# EAGLE board 13514_TeensyView-panel.v10 (EAGLE 7.5.0), part 1 of 3
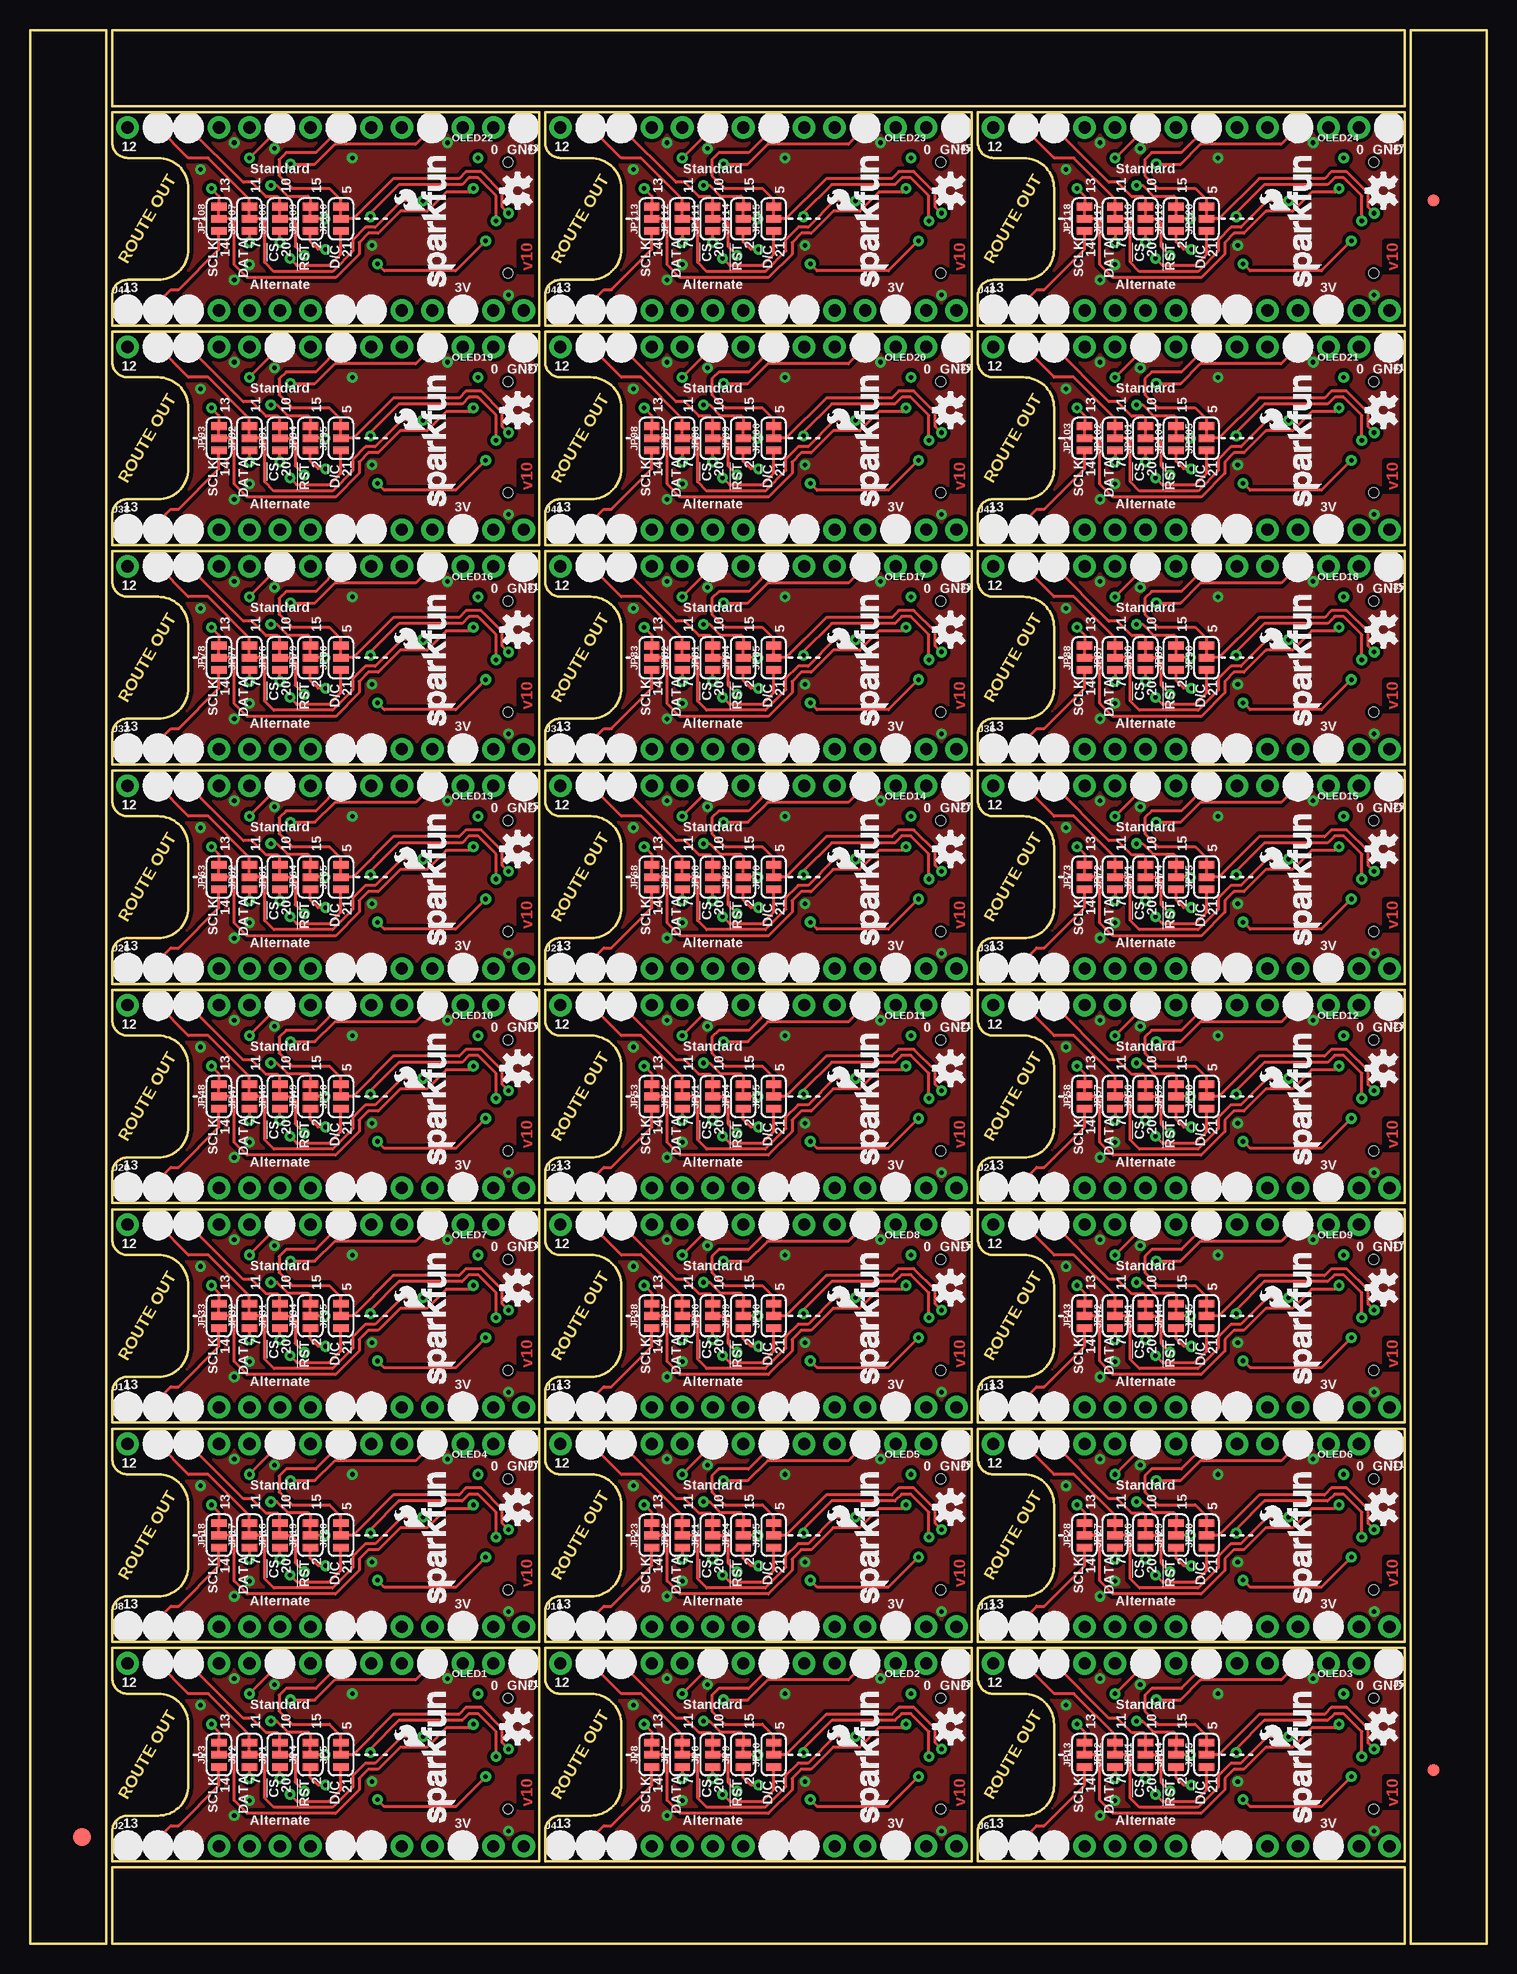
[diagram p0: board, top side]
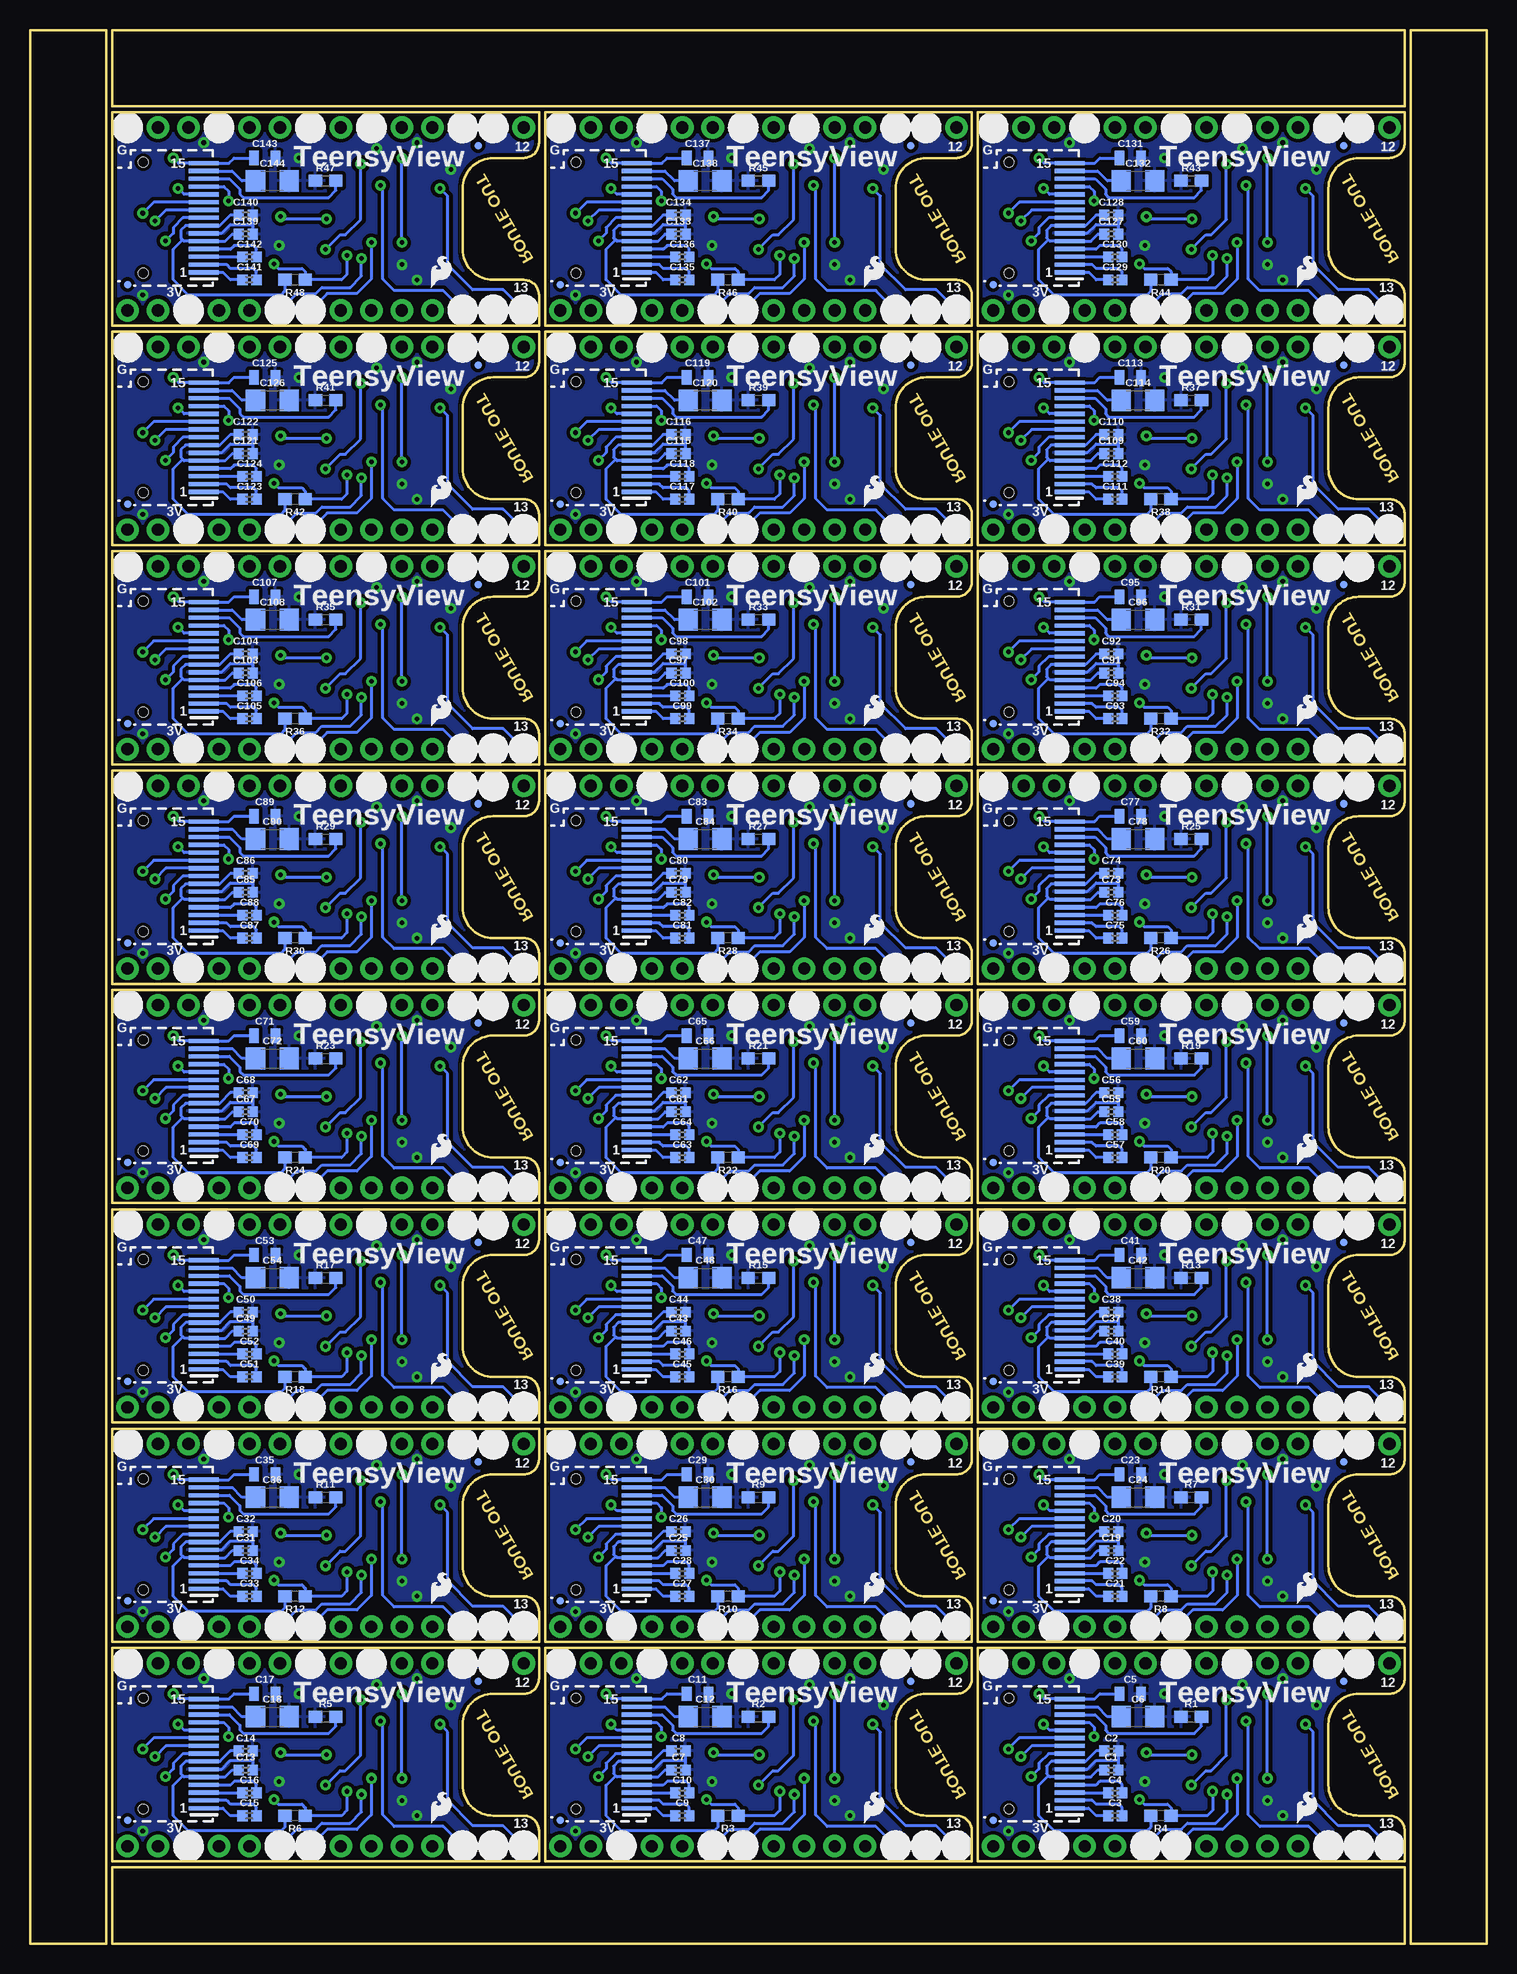
[diagram p1: board, bottom side, seen from below]

Size 121.41 x 159.51 mm. Coordinates in mm from the lower left corner, seen from the top.
Outline: 312 segments
Copper layers (1*16): Top 0.035mm / dielectric 1.5mm / Bottom 0.035mm
Design rules "SparkFun-2-layer-STANDARD": minimum track width 10mil, minimum drill 20mil, track to track 10mil, track to pad 8mil, pad to pad 8mil, via to via 10mil, smd to smd 8mil, copper to edge 8mil, drill to drill 8mil, minimum pad ring 10mil, minimum via ring 10mil, stop-mask expansion 4mil, vias tented up to drill 25mil, thermal gap 10mil

## Footprints (pad centres in the part's own frame; a part is rotated, then mirrored left to right if it is on the bottom)
0402 = smd 0.85 x 0.9: 1 -0.58,0; 2 0.58,0
0805 = smd 0.8 x 1.2: 1 -0.9,0; 2 0.9,0
1206 = smd 1.6 x 1.8: 1 -1.4,0; 2 1.4,0
FIDUCIAL-1.5X3 = smd 1.5 x 1.5: 1 0,0
FIDUCIAL-1X2 = smd 1 x 1: 1 0,0
FIDUCIAL-MICRO = smd 0.635 x 0.635: 1 0,0
1X14_NO_SILK = drill 1.016 pad 1.88: 1 0,0; 2 2.54,0; 3 5.08,0; 4 7.62,0; 5 10.16,0; 6 12.7,0; 7 15.24,0; 8 17.78,0; 9 20.32,0; 10 22.86,0; 11 25.4,0; 12 27.94,0; 13 30.48,0; 14 33.02,0
SMT-JUMPER_3_1-NC_TRACE_SILK = smd 0.635 x 1.27: 1 -1.016,0; 2 0,0; 3 1.016,0
OLED-UG-2832TSWGG01-REAR = smd 2.5 x 0.35 bottom: 1 0.75,-10.175; 2 0.75,-9.525; 3 0.75,-8.875; 4 0.75,-8.225; 5 0.75,-7.575; 6 0.75,-6.925; 7 0.75,-6.275; 8 0.75,-5.625; 9 0.75,-4.975; 10 0.75,-4.325; 11 0.75,-3.675; 12 0.75,-3.025; 13 0.75,-2.375; 14 0.75,-1.725; 15 0.75,-1.075 | hole 0.8: 5.8,-1; 5.8,-10.25
0603 = smd 1.1 x 1: 1 -0.85,0; 2 0.85,0
TP_15TH = drill 0.381 pad 0.61: P$1 0,0

## Placement (x,y rotation side)
C1  1.0uF  [0402]  31.31,14.48 0 bottom
C2  1.0uF  [0402]  31.31,16.07 0 bottom
C3  1.0uF  [0402]  30.99,10.67 0 bottom
C4  1.0uF  [0402]  30.99,12.57 0 bottom
C5  2.2uF  [0805]  29.72,20.83 0 bottom
C6  4.7uF  [1206]  29.08,18.92 0 bottom
C7  1.0uF  [0402]  67.37,14.48 0 bottom
C8  1.0uF  [0402]  67.37,16.07 0 bottom
C9  1.0uF  [0402]  67.06,10.67 0 bottom
C10  1.0uF  [0402]  67.06,12.57 0 bottom
C11  2.2uF  [0805]  65.79,20.83 0 bottom
C12  4.7uF  [1206]  65.15,18.92 0 bottom
C13  1.0uF  [0402]  103.44,14.48 0 bottom
C14  1.0uF  [0402]  103.44,16.07 0 bottom
C15  1.0uF  [0402]  103.12,10.67 0 bottom
C16  1.0uF  [0402]  103.12,12.57 0 bottom
C17  2.2uF  [0805]  101.85,20.83 0 bottom
C18  4.7uF  [1206]  101.22,18.92 0 bottom
C19  1.0uF  [0402]  31.31,32.77 0 bottom
C20  1.0uF  [0402]  31.31,34.35 0 bottom
C21  1.0uF  [0402]  30.99,28.96 0 bottom
C22  1.0uF  [0402]  30.99,30.86 0 bottom
C23  2.2uF  [0805]  29.72,39.12 0 bottom
C24  4.7uF  [1206]  29.08,37.21 0 bottom
C25  1.0uF  [0402]  67.37,32.77 0 bottom
C26  1.0uF  [0402]  67.37,34.35 0 bottom
C27  1.0uF  [0402]  67.06,28.96 0 bottom
C28  1.0uF  [0402]  67.06,30.86 0 bottom
C29  2.2uF  [0805]  65.79,39.12 0 bottom
C30  4.7uF  [1206]  65.15,37.21 0 bottom
C31  1.0uF  [0402]  103.44,32.77 0 bottom
C32  1.0uF  [0402]  103.44,34.35 0 bottom
C33  1.0uF  [0402]  103.12,28.96 0 bottom
C34  1.0uF  [0402]  103.12,30.86 0 bottom
C35  2.2uF  [0805]  101.85,39.12 0 bottom
C36  4.7uF  [1206]  101.22,37.21 0 bottom
C37  1.0uF  [0402]  31.31,51.05 0 bottom
C38  1.0uF  [0402]  31.31,52.64 0 bottom
C39  1.0uF  [0402]  30.99,47.24 0 bottom
C40  1.0uF  [0402]  30.99,49.15 0 bottom
C41  2.2uF  [0805]  29.72,57.4 0 bottom
C42  4.7uF  [1206]  29.08,55.5 0 bottom
C43  1.0uF  [0402]  67.37,51.05 0 bottom
C44  1.0uF  [0402]  67.37,52.64 0 bottom
C45  1.0uF  [0402]  67.06,47.24 0 bottom
C46  1.0uF  [0402]  67.06,49.15 0 bottom
C47  2.2uF  [0805]  65.79,57.4 0 bottom
C48  4.7uF  [1206]  65.15,55.5 0 bottom
C49  1.0uF  [0402]  103.44,51.05 0 bottom
C50  1.0uF  [0402]  103.44,52.64 0 bottom
C51  1.0uF  [0402]  103.12,47.24 0 bottom
C52  1.0uF  [0402]  103.12,49.15 0 bottom
C53  2.2uF  [0805]  101.85,57.4 0 bottom
C54  4.7uF  [1206]  101.22,55.5 0 bottom
C55  1.0uF  [0402]  31.31,69.34 0 bottom
C56  1.0uF  [0402]  31.31,70.93 0 bottom
C57  1.0uF  [0402]  30.99,65.53 0 bottom
C58  1.0uF  [0402]  30.99,67.44 0 bottom
C59  2.2uF  [0805]  29.72,75.69 0 bottom
C60  4.7uF  [1206]  29.08,73.79 0 bottom
C61  1.0uF  [0402]  67.37,69.34 0 bottom
C62  1.0uF  [0402]  67.37,70.93 0 bottom
C63  1.0uF  [0402]  67.06,65.53 0 bottom
C64  1.0uF  [0402]  67.06,67.44 0 bottom
C65  2.2uF  [0805]  65.79,75.69 0 bottom
C66  4.7uF  [1206]  65.15,73.79 0 bottom
C67  1.0uF  [0402]  103.44,69.34 0 bottom
C68  1.0uF  [0402]  103.44,70.93 0 bottom
C69  1.0uF  [0402]  103.12,65.53 0 bottom
C70  1.0uF  [0402]  103.12,67.44 0 bottom
C71  2.2uF  [0805]  101.85,75.69 0 bottom
C72  4.7uF  [1206]  101.22,73.79 0 bottom
C73  1.0uF  [0402]  31.31,87.63 0 bottom
C74  1.0uF  [0402]  31.31,89.22 0 bottom
C75  1.0uF  [0402]  30.99,83.82 0 bottom
C76  1.0uF  [0402]  30.99,85.72 0 bottom
C77  2.2uF  [0805]  29.72,93.98 0 bottom
C78  4.7uF  [1206]  29.08,92.08 0 bottom
C79  1.0uF  [0402]  67.37,87.63 0 bottom
C80  1.0uF  [0402]  67.37,89.22 0 bottom
C81  1.0uF  [0402]  67.06,83.82 0 bottom
C82  1.0uF  [0402]  67.06,85.72 0 bottom
C83  2.2uF  [0805]  65.79,93.98 0 bottom
C84  4.7uF  [1206]  65.15,92.08 0 bottom
C85  1.0uF  [0402]  103.44,87.63 0 bottom
C86  1.0uF  [0402]  103.44,89.22 0 bottom
C87  1.0uF  [0402]  103.12,83.82 0 bottom
C88  1.0uF  [0402]  103.12,85.72 0 bottom
C89  2.2uF  [0805]  101.85,93.98 0 bottom
C90  4.7uF  [1206]  101.22,92.08 0 bottom
C91  1.0uF  [0402]  31.31,105.92 0 bottom
C92  1.0uF  [0402]  31.31,107.51 0 bottom
C93  1.0uF  [0402]  30.99,102.11 0 bottom
C94  1.0uF  [0402]  30.99,104.01 0 bottom
C95  2.2uF  [0805]  29.72,112.27 0 bottom
C96  4.7uF  [1206]  29.08,110.36 0 bottom
C97  1.0uF  [0402]  67.37,105.92 0 bottom
C98  1.0uF  [0402]  67.37,107.51 0 bottom
C99  1.0uF  [0402]  67.06,102.11 0 bottom
C100  1.0uF  [0402]  67.06,104.01 0 bottom
C101  2.2uF  [0805]  65.79,112.27 0 bottom
C102  4.7uF  [1206]  65.15,110.36 0 bottom
C103  1.0uF  [0402]  103.44,105.92 0 bottom
C104  1.0uF  [0402]  103.44,107.51 0 bottom
C105  1.0uF  [0402]  103.12,102.11 0 bottom
C106  1.0uF  [0402]  103.12,104.01 0 bottom
C107  2.2uF  [0805]  101.85,112.27 0 bottom
C108  4.7uF  [1206]  101.22,110.36 0 bottom
C109  1.0uF  [0402]  31.31,124.21 0 bottom
C110  1.0uF  [0402]  31.31,125.79 0 bottom
C111  1.0uF  [0402]  30.99,120.4 0 bottom
C112  1.0uF  [0402]  30.99,122.3 0 bottom
C113  2.2uF  [0805]  29.72,130.56 0 bottom
C114  4.7uF  [1206]  29.08,128.65 0 bottom
C115  1.0uF  [0402]  67.37,124.21 0 bottom
C116  1.0uF  [0402]  67.37,125.79 0 bottom
C117  1.0uF  [0402]  67.06,120.4 0 bottom
C118  1.0uF  [0402]  67.06,122.3 0 bottom
C119  2.2uF  [0805]  65.79,130.56 0 bottom
C120  4.7uF  [1206]  65.15,128.65 0 bottom
C121  1.0uF  [0402]  103.44,124.21 0 bottom
C122  1.0uF  [0402]  103.44,125.79 0 bottom
C123  1.0uF  [0402]  103.12,120.4 0 bottom
C124  1.0uF  [0402]  103.12,122.3 0 bottom
C125  2.2uF  [0805]  101.85,130.56 0 bottom
C126  4.7uF  [1206]  101.22,128.65 0 bottom
C127  1.0uF  [0402]  31.31,142.49 0 bottom
C128  1.0uF  [0402]  31.31,144.08 0 bottom
C129  1.0uF  [0402]  30.99,138.68 0 bottom
C130  1.0uF  [0402]  30.99,140.59 0 bottom
C131  2.2uF  [0805]  29.72,148.84 0 bottom
C132  4.7uF  [1206]  29.08,146.94 0 bottom
C133  1.0uF  [0402]  67.37,142.49 0 bottom
C134  1.0uF  [0402]  67.37,144.08 0 bottom
C135  1.0uF  [0402]  67.06,138.68 0 bottom
C136  1.0uF  [0402]  67.06,140.59 0 bottom
C137  2.2uF  [0805]  65.79,148.84 0 bottom
C138  4.7uF  [1206]  65.15,146.94 0 bottom
C139  1.0uF  [0402]  103.44,142.49 0 bottom
C140  1.0uF  [0402]  103.44,144.08 0 bottom
C141  1.0uF  [0402]  103.12,138.68 0 bottom
C142  1.0uF  [0402]  103.12,140.59 0 bottom
C143  2.2uF  [0805]  101.85,148.84 0 bottom
C144  4.7uF  [1206]  101.22,146.94 0 bottom
E$1  [FIDUCIAL-1.5X3]  4.32,8.89 0 top
E$7  [FIDUCIAL-1X2]  116.97,145.29 180 top
E$8  [FIDUCIAL-1X2]  116.97,14.48 0 top
FD1  FIDUCIALUFIDUCIAL  [FIDUCIAL-MICRO]  41.15,10.27 0 bottom
FD2  FIDUCIALUFIDUCIAL  [FIDUCIAL-MICRO]  11.94,21.86 0 bottom
FD3  FIDUCIALUFIDUCIAL  [FIDUCIAL-MICRO]  77.22,10.27 0 bottom
FD4  FIDUCIALUFIDUCIAL  [FIDUCIAL-MICRO]  48.01,21.86 0 bottom
FD5  FIDUCIALUFIDUCIAL  [FIDUCIAL-MICRO]  113.28,10.27 0 bottom
FD6  FIDUCIALUFIDUCIAL  [FIDUCIAL-MICRO]  84.07,21.86 0 bottom
FD7  FIDUCIALUFIDUCIAL  [FIDUCIAL-MICRO]  41.15,28.56 0 bottom
FD8  FIDUCIALUFIDUCIAL  [FIDUCIAL-MICRO]  11.94,40.15 0 bottom
FD9  FIDUCIALUFIDUCIAL  [FIDUCIAL-MICRO]  77.22,28.56 0 bottom
FD10  FIDUCIALUFIDUCIAL  [FIDUCIAL-MICRO]  48.01,40.15 0 bottom
FD11  FIDUCIALUFIDUCIAL  [FIDUCIAL-MICRO]  113.28,28.56 0 bottom
FD12  FIDUCIALUFIDUCIAL  [FIDUCIAL-MICRO]  84.07,40.15 0 bottom
FD13  FIDUCIALUFIDUCIAL  [FIDUCIAL-MICRO]  41.15,46.85 0 bottom
FD14  FIDUCIALUFIDUCIAL  [FIDUCIAL-MICRO]  11.94,58.44 0 bottom
FD15  FIDUCIALUFIDUCIAL  [FIDUCIAL-MICRO]  77.22,46.85 0 bottom
FD16  FIDUCIALUFIDUCIAL  [FIDUCIAL-MICRO]  48.01,58.44 0 bottom
FD17  FIDUCIALUFIDUCIAL  [FIDUCIAL-MICRO]  113.28,46.85 0 bottom
FD18  FIDUCIALUFIDUCIAL  [FIDUCIAL-MICRO]  84.07,58.44 0 bottom
FD19  FIDUCIALUFIDUCIAL  [FIDUCIAL-MICRO]  41.15,65.14 0 bottom
FD20  FIDUCIALUFIDUCIAL  [FIDUCIAL-MICRO]  11.94,76.72 0 bottom
FD21  FIDUCIALUFIDUCIAL  [FIDUCIAL-MICRO]  77.22,65.14 0 bottom
FD22  FIDUCIALUFIDUCIAL  [FIDUCIAL-MICRO]  48.01,76.72 0 bottom
FD23  FIDUCIALUFIDUCIAL  [FIDUCIAL-MICRO]  113.28,65.14 0 bottom
FD24  FIDUCIALUFIDUCIAL  [FIDUCIAL-MICRO]  84.07,76.72 0 bottom
FD25  FIDUCIALUFIDUCIAL  [FIDUCIAL-MICRO]  41.15,83.42 0 bottom
FD26  FIDUCIALUFIDUCIAL  [FIDUCIAL-MICRO]  11.94,95.01 0 bottom
FD27  FIDUCIALUFIDUCIAL  [FIDUCIAL-MICRO]  77.22,83.42 0 bottom
FD28  FIDUCIALUFIDUCIAL  [FIDUCIAL-MICRO]  48.01,95.01 0 bottom
FD29  FIDUCIALUFIDUCIAL  [FIDUCIAL-MICRO]  113.28,83.42 0 bottom
FD30  FIDUCIALUFIDUCIAL  [FIDUCIAL-MICRO]  84.07,95.01 0 bottom
FD31  FIDUCIALUFIDUCIAL  [FIDUCIAL-MICRO]  41.15,101.71 0 bottom
FD32  FIDUCIALUFIDUCIAL  [FIDUCIAL-MICRO]  11.94,113.3 0 bottom
FD33  FIDUCIALUFIDUCIAL  [FIDUCIAL-MICRO]  77.22,101.71 0 bottom
FD34  FIDUCIALUFIDUCIAL  [FIDUCIAL-MICRO]  48.01,113.3 0 bottom
FD35  FIDUCIALUFIDUCIAL  [FIDUCIAL-MICRO]  113.28,101.71 0 bottom
FD36  FIDUCIALUFIDUCIAL  [FIDUCIAL-MICRO]  84.07,113.3 0 bottom
FD37  FIDUCIALUFIDUCIAL  [FIDUCIAL-MICRO]  41.15,120 0 bottom
FD38  FIDUCIALUFIDUCIAL  [FIDUCIAL-MICRO]  11.94,131.59 0 bottom
FD39  FIDUCIALUFIDUCIAL  [FIDUCIAL-MICRO]  77.22,120 0 bottom
FD40  FIDUCIALUFIDUCIAL  [FIDUCIAL-MICRO]  48.01,131.59 0 bottom
FD41  FIDUCIALUFIDUCIAL  [FIDUCIAL-MICRO]  113.28,120 0 bottom
FD42  FIDUCIALUFIDUCIAL  [FIDUCIAL-MICRO]  84.07,131.59 0 bottom
FD43  FIDUCIALUFIDUCIAL  [FIDUCIAL-MICRO]  41.15,138.29 0 bottom
FD44  FIDUCIALUFIDUCIAL  [FIDUCIAL-MICRO]  11.94,149.88 0 bottom
FD45  FIDUCIALUFIDUCIAL  [FIDUCIAL-MICRO]  77.22,138.29 0 bottom
FD46  FIDUCIALUFIDUCIAL  [FIDUCIAL-MICRO]  48.01,149.88 0 bottom
FD47  FIDUCIALUFIDUCIAL  [FIDUCIAL-MICRO]  113.28,138.29 0 bottom
FD48  FIDUCIALUFIDUCIAL  [FIDUCIAL-MICRO]  84.07,149.88 0 bottom
J1  DNP  [1X14_NO_SILK]  41.15,23.37 180 top
J2  DNP  [1X14_NO_SILK]  8.13,8.13 0 top
J3  DNP  [1X14_NO_SILK]  77.22,23.37 180 top
J4  DNP  [1X14_NO_SILK]  44.2,8.13 0 top
J5  DNP  [1X14_NO_SILK]  113.28,23.37 180 top
J6  DNP  [1X14_NO_SILK]  80.26,8.13 0 top
J7  DNP  [1X14_NO_SILK]  41.15,41.66 180 top
J8  DNP  [1X14_NO_SILK]  8.13,26.42 0 top
J9  DNP  [1X14_NO_SILK]  77.22,41.66 180 top
J10  DNP  [1X14_NO_SILK]  44.2,26.42 0 top
J11  DNP  [1X14_NO_SILK]  113.28,41.66 180 top
J12  DNP  [1X14_NO_SILK]  80.26,26.42 0 top
J13  DNP  [1X14_NO_SILK]  41.15,59.94 180 top
J14  DNP  [1X14_NO_SILK]  8.13,44.7 0 top
J15  DNP  [1X14_NO_SILK]  77.22,59.94 180 top
J16  DNP  [1X14_NO_SILK]  44.2,44.7 0 top
J17  DNP  [1X14_NO_SILK]  113.28,59.94 180 top
J18  DNP  [1X14_NO_SILK]  80.26,44.7 0 top
J19  DNP  [1X14_NO_SILK]  41.15,78.23 180 top
J20  DNP  [1X14_NO_SILK]  8.13,62.99 0 top
J21  DNP  [1X14_NO_SILK]  77.22,78.23 180 top
J22  DNP  [1X14_NO_SILK]  44.2,62.99 0 top
J23  DNP  [1X14_NO_SILK]  113.28,78.23 180 top
J24  DNP  [1X14_NO_SILK]  80.26,62.99 0 top
J25  DNP  [1X14_NO_SILK]  41.15,96.52 180 top
J26  DNP  [1X14_NO_SILK]  8.13,81.28 0 top
J27  DNP  [1X14_NO_SILK]  77.22,96.52 180 top
J28  DNP  [1X14_NO_SILK]  44.2,81.28 0 top
J29  DNP  [1X14_NO_SILK]  113.28,96.52 180 top
J30  DNP  [1X14_NO_SILK]  80.26,81.28 0 top
J31  DNP  [1X14_NO_SILK]  41.15,114.81 180 top
J32  DNP  [1X14_NO_SILK]  8.13,99.57 0 top
J33  DNP  [1X14_NO_SILK]  77.22,114.81 180 top
J34  DNP  [1X14_NO_SILK]  44.2,99.57 0 top
J35  DNP  [1X14_NO_SILK]  113.28,114.81 180 top
J36  DNP  [1X14_NO_SILK]  80.26,99.57 0 top
J37  DNP  [1X14_NO_SILK]  41.15,133.1 180 top
J38  DNP  [1X14_NO_SILK]  8.13,117.86 0 top
J39  DNP  [1X14_NO_SILK]  77.22,133.1 180 top
J40  DNP  [1X14_NO_SILK]  44.2,117.86 0 top
J41  DNP  [1X14_NO_SILK]  113.28,133.1 180 top
J42  DNP  [1X14_NO_SILK]  80.26,117.86 0 top
J43  DNP  [1X14_NO_SILK]  41.15,151.38 180 top
J44  DNP  [1X14_NO_SILK]  8.13,136.14 0 top
J45  DNP  [1X14_NO_SILK]  77.22,151.38 180 top
J46  DNP  [1X14_NO_SILK]  44.2,136.14 0 top
J47  DNP  [1X14_NO_SILK]  113.28,151.38 180 top
J48  DNP  [1X14_NO_SILK]  80.26,136.14 0 top
JP1  JUMPER-SMT_3_1-NC_TRACE_SILK  [SMT-JUMPER_3_1-NC_TRACE_SILK]  20.83,15.75 90 top
JP2  JUMPER-SMT_3_1-NC_TRACE_SILK  [SMT-JUMPER_3_1-NC_TRACE_SILK]  18.29,15.75 90 top
JP3  JUMPER-SMT_3_1-NC_TRACE_SILK  [SMT-JUMPER_3_1-NC_TRACE_SILK]  15.75,15.75 90 top
JP4  JUMPER-SMT_3_1-NC_TRACE_SILK  [SMT-JUMPER_3_1-NC_TRACE_SILK]  23.37,15.75 90 top
JP5  JUMPER-SMT_3_1-NC_TRACE_SILK  [SMT-JUMPER_3_1-NC_TRACE_SILK]  25.91,15.75 90 top
JP6  JUMPER-SMT_3_1-NC_TRACE_SILK  [SMT-JUMPER_3_1-NC_TRACE_SILK]  56.9,15.75 90 top
JP7  JUMPER-SMT_3_1-NC_TRACE_SILK  [SMT-JUMPER_3_1-NC_TRACE_SILK]  54.36,15.75 90 top
JP8  JUMPER-SMT_3_1-NC_TRACE_SILK  [SMT-JUMPER_3_1-NC_TRACE_SILK]  51.82,15.75 90 top
JP9  JUMPER-SMT_3_1-NC_TRACE_SILK  [SMT-JUMPER_3_1-NC_TRACE_SILK]  59.44,15.75 90 top
JP10  JUMPER-SMT_3_1-NC_TRACE_SILK  [SMT-JUMPER_3_1-NC_TRACE_SILK]  61.98,15.75 90 top
JP11  JUMPER-SMT_3_1-NC_TRACE_SILK  [SMT-JUMPER_3_1-NC_TRACE_SILK]  92.96,15.75 90 top
JP12  JUMPER-SMT_3_1-NC_TRACE_SILK  [SMT-JUMPER_3_1-NC_TRACE_SILK]  90.42,15.75 90 top
JP13  JUMPER-SMT_3_1-NC_TRACE_SILK  [SMT-JUMPER_3_1-NC_TRACE_SILK]  87.88,15.75 90 top
JP14  JUMPER-SMT_3_1-NC_TRACE_SILK  [SMT-JUMPER_3_1-NC_TRACE_SILK]  95.5,15.75 90 top
JP15  JUMPER-SMT_3_1-NC_TRACE_SILK  [SMT-JUMPER_3_1-NC_TRACE_SILK]  98.04,15.75 90 top
JP16  JUMPER-SMT_3_1-NC_TRACE_SILK  [SMT-JUMPER_3_1-NC_TRACE_SILK]  20.83,34.04 90 top
JP17  JUMPER-SMT_3_1-NC_TRACE_SILK  [SMT-JUMPER_3_1-NC_TRACE_SILK]  18.29,34.04 90 top
JP18  JUMPER-SMT_3_1-NC_TRACE_SILK  [SMT-JUMPER_3_1-NC_TRACE_SILK]  15.75,34.04 90 top
JP19  JUMPER-SMT_3_1-NC_TRACE_SILK  [SMT-JUMPER_3_1-NC_TRACE_SILK]  23.37,34.04 90 top
JP20  JUMPER-SMT_3_1-NC_TRACE_SILK  [SMT-JUMPER_3_1-NC_TRACE_SILK]  25.91,34.04 90 top
JP21  JUMPER-SMT_3_1-NC_TRACE_SILK  [SMT-JUMPER_3_1-NC_TRACE_SILK]  56.9,34.04 90 top
JP22  JUMPER-SMT_3_1-NC_TRACE_SILK  [SMT-JUMPER_3_1-NC_TRACE_SILK]  54.36,34.04 90 top
JP23  JUMPER-SMT_3_1-NC_TRACE_SILK  [SMT-JUMPER_3_1-NC_TRACE_SILK]  51.82,34.04 90 top
JP24  JUMPER-SMT_3_1-NC_TRACE_SILK  [SMT-JUMPER_3_1-NC_TRACE_SILK]  59.44,34.04 90 top
JP25  JUMPER-SMT_3_1-NC_TRACE_SILK  [SMT-JUMPER_3_1-NC_TRACE_SILK]  61.98,34.04 90 top
JP26  JUMPER-SMT_3_1-NC_TRACE_SILK  [SMT-JUMPER_3_1-NC_TRACE_SILK]  92.96,34.04 90 top
JP27  JUMPER-SMT_3_1-NC_TRACE_SILK  [SMT-JUMPER_3_1-NC_TRACE_SILK]  90.42,34.04 90 top
JP28  JUMPER-SMT_3_1-NC_TRACE_SILK  [SMT-JUMPER_3_1-NC_TRACE_SILK]  87.88,34.04 90 top
JP29  JUMPER-SMT_3_1-NC_TRACE_SILK  [SMT-JUMPER_3_1-NC_TRACE_SILK]  95.5,34.04 90 top
JP30  JUMPER-SMT_3_1-NC_TRACE_SILK  [SMT-JUMPER_3_1-NC_TRACE_SILK]  98.04,34.04 90 top
JP31  JUMPER-SMT_3_1-NC_TRACE_SILK  [SMT-JUMPER_3_1-NC_TRACE_SILK]  20.83,52.32 90 top
JP32  JUMPER-SMT_3_1-NC_TRACE_SILK  [SMT-JUMPER_3_1-NC_TRACE_SILK]  18.29,52.32 90 top
JP33  JUMPER-SMT_3_1-NC_TRACE_SILK  [SMT-JUMPER_3_1-NC_TRACE_SILK]  15.75,52.32 90 top
JP34  JUMPER-SMT_3_1-NC_TRACE_SILK  [SMT-JUMPER_3_1-NC_TRACE_SILK]  23.37,52.32 90 top
JP35  JUMPER-SMT_3_1-NC_TRACE_SILK  [SMT-JUMPER_3_1-NC_TRACE_SILK]  25.91,52.32 90 top
JP36  JUMPER-SMT_3_1-NC_TRACE_SILK  [SMT-JUMPER_3_1-NC_TRACE_SILK]  56.9,52.32 90 top
JP37  JUMPER-SMT_3_1-NC_TRACE_SILK  [SMT-JUMPER_3_1-NC_TRACE_SILK]  54.36,52.32 90 top
JP38  JUMPER-SMT_3_1-NC_TRACE_SILK  [SMT-JUMPER_3_1-NC_TRACE_SILK]  51.82,52.32 90 top
JP39  JUMPER-SMT_3_1-NC_TRACE_SILK  [SMT-JUMPER_3_1-NC_TRACE_SILK]  59.44,52.32 90 top
JP40  JUMPER-SMT_3_1-NC_TRACE_SILK  [SMT-JUMPER_3_1-NC_TRACE_SILK]  61.98,52.32 90 top
JP41  JUMPER-SMT_3_1-NC_TRACE_SILK  [SMT-JUMPER_3_1-NC_TRACE_SILK]  92.96,52.32 90 top
JP42  JUMPER-SMT_3_1-NC_TRACE_SILK  [SMT-JUMPER_3_1-NC_TRACE_SILK]  90.42,52.32 90 top
JP43  JUMPER-SMT_3_1-NC_TRACE_SILK  [SMT-JUMPER_3_1-NC_TRACE_SILK]  87.88,52.32 90 top
JP44  JUMPER-SMT_3_1-NC_TRACE_SILK  [SMT-JUMPER_3_1-NC_TRACE_SILK]  95.5,52.32 90 top
JP45  JUMPER-SMT_3_1-NC_TRACE_SILK  [SMT-JUMPER_3_1-NC_TRACE_SILK]  98.04,52.32 90 top
JP46  JUMPER-SMT_3_1-NC_TRACE_SILK  [SMT-JUMPER_3_1-NC_TRACE_SILK]  20.83,70.61 90 top
JP47  JUMPER-SMT_3_1-NC_TRACE_SILK  [SMT-JUMPER_3_1-NC_TRACE_SILK]  18.29,70.61 90 top
JP48  JUMPER-SMT_3_1-NC_TRACE_SILK  [SMT-JUMPER_3_1-NC_TRACE_SILK]  15.75,70.61 90 top
JP49  JUMPER-SMT_3_1-NC_TRACE_SILK  [SMT-JUMPER_3_1-NC_TRACE_SILK]  23.37,70.61 90 top
JP50  JUMPER-SMT_3_1-NC_TRACE_SILK  [SMT-JUMPER_3_1-NC_TRACE_SILK]  25.91,70.61 90 top
JP51  JUMPER-SMT_3_1-NC_TRACE_SILK  [SMT-JUMPER_3_1-NC_TRACE_SILK]  56.9,70.61 90 top
JP52  JUMPER-SMT_3_1-NC_TRACE_SILK  [SMT-JUMPER_3_1-NC_TRACE_SILK]  54.36,70.61 90 top
JP53  JUMPER-SMT_3_1-NC_TRACE_SILK  [SMT-JUMPER_3_1-NC_TRACE_SILK]  51.82,70.61 90 top
JP54  JUMPER-SMT_3_1-NC_TRACE_SILK  [SMT-JUMPER_3_1-NC_TRACE_SILK]  59.44,70.61 90 top
JP55  JUMPER-SMT_3_1-NC_TRACE_SILK  [SMT-JUMPER_3_1-NC_TRACE_SILK]  61.98,70.61 90 top
JP56  JUMPER-SMT_3_1-NC_TRACE_SILK  [SMT-JUMPER_3_1-NC_TRACE_SILK]  92.96,70.61 90 top
JP57  JUMPER-SMT_3_1-NC_TRACE_SILK  [SMT-JUMPER_3_1-NC_TRACE_SILK]  90.42,70.61 90 top
JP58  JUMPER-SMT_3_1-NC_TRACE_SILK  [SMT-JUMPER_3_1-NC_TRACE_SILK]  87.88,70.61 90 top
JP59  JUMPER-SMT_3_1-NC_TRACE_SILK  [SMT-JUMPER_3_1-NC_TRACE_SILK]  95.5,70.61 90 top
JP60  JUMPER-SMT_3_1-NC_TRACE_SILK  [SMT-JUMPER_3_1-NC_TRACE_SILK]  98.04,70.61 90 top
JP61  JUMPER-SMT_3_1-NC_TRACE_SILK  [SMT-JUMPER_3_1-NC_TRACE_SILK]  20.83,88.9 90 top
JP62  JUMPER-SMT_3_1-NC_TRACE_SILK  [SMT-JUMPER_3_1-NC_TRACE_SILK]  18.29,88.9 90 top
JP63  JUMPER-SMT_3_1-NC_TRACE_SILK  [SMT-JUMPER_3_1-NC_TRACE_SILK]  15.75,88.9 90 top
JP64  JUMPER-SMT_3_1-NC_TRACE_SILK  [SMT-JUMPER_3_1-NC_TRACE_SILK]  23.37,88.9 90 top
JP65  JUMPER-SMT_3_1-NC_TRACE_SILK  [SMT-JUMPER_3_1-NC_TRACE_SILK]  25.91,88.9 90 top
JP66  JUMPER-SMT_3_1-NC_TRACE_SILK  [SMT-JUMPER_3_1-NC_TRACE_SILK]  56.9,88.9 90 top
JP67  JUMPER-SMT_3_1-NC_TRACE_SILK  [SMT-JUMPER_3_1-NC_TRACE_SILK]  54.36,88.9 90 top
JP68  JUMPER-SMT_3_1-NC_TRACE_SILK  [SMT-JUMPER_3_1-NC_TRACE_SILK]  51.82,88.9 90 top
JP69  JUMPER-SMT_3_1-NC_TRACE_SILK  [SMT-JUMPER_3_1-NC_TRACE_SILK]  59.44,88.9 90 top
JP70  JUMPER-SMT_3_1-NC_TRACE_SILK  [SMT-JUMPER_3_1-NC_TRACE_SILK]  61.98,88.9 90 top
JP71  JUMPER-SMT_3_1-NC_TRACE_SILK  [SMT-JUMPER_3_1-NC_TRACE_SILK]  92.96,88.9 90 top
JP72  JUMPER-SMT_3_1-NC_TRACE_SILK  [SMT-JUMPER_3_1-NC_TRACE_SILK]  90.42,88.9 90 top
JP73  JUMPER-SMT_3_1-NC_TRACE_SILK  [SMT-JUMPER_3_1-NC_TRACE_SILK]  87.88,88.9 90 top
JP74  JUMPER-SMT_3_1-NC_TRACE_SILK  [SMT-JUMPER_3_1-NC_TRACE_SILK]  95.5,88.9 90 top
JP75  JUMPER-SMT_3_1-NC_TRACE_SILK  [SMT-JUMPER_3_1-NC_TRACE_SILK]  98.04,88.9 90 top
JP76  JUMPER-SMT_3_1-NC_TRACE_SILK  [SMT-JUMPER_3_1-NC_TRACE_SILK]  20.83,107.19 90 top
JP77  JUMPER-SMT_3_1-NC_TRACE_SILK  [SMT-JUMPER_3_1-NC_TRACE_SILK]  18.29,107.19 90 top
JP78  JUMPER-SMT_3_1-NC_TRACE_SILK  [SMT-JUMPER_3_1-NC_TRACE_SILK]  15.75,107.19 90 top
JP79  JUMPER-SMT_3_1-NC_TRACE_SILK  [SMT-JUMPER_3_1-NC_TRACE_SILK]  23.37,107.19 90 top
JP80  JUMPER-SMT_3_1-NC_TRACE_SILK  [SMT-JUMPER_3_1-NC_TRACE_SILK]  25.91,107.19 90 top
JP81  JUMPER-SMT_3_1-NC_TRACE_SILK  [SMT-JUMPER_3_1-NC_TRACE_SILK]  56.9,107.19 90 top
JP82  JUMPER-SMT_3_1-NC_TRACE_SILK  [SMT-JUMPER_3_1-NC_TRACE_SILK]  54.36,107.19 90 top
JP83  JUMPER-SMT_3_1-NC_TRACE_SILK  [SMT-JUMPER_3_1-NC_TRACE_SILK]  51.82,107.19 90 top
JP84  JUMPER-SMT_3_1-NC_TRACE_SILK  [SMT-JUMPER_3_1-NC_TRACE_SILK]  59.44,107.19 90 top
JP85  JUMPER-SMT_3_1-NC_TRACE_SILK  [SMT-JUMPER_3_1-NC_TRACE_SILK]  61.98,107.19 90 top
JP86  JUMPER-SMT_3_1-NC_TRACE_SILK  [SMT-JUMPER_3_1-NC_TRACE_SILK]  92.96,107.19 90 top
JP87  JUMPER-SMT_3_1-NC_TRACE_SILK  [SMT-JUMPER_3_1-NC_TRACE_SILK]  90.42,107.19 90 top
JP88  JUMPER-SMT_3_1-NC_TRACE_SILK  [SMT-JUMPER_3_1-NC_TRACE_SILK]  87.88,107.19 90 top
JP89  JUMPER-SMT_3_1-NC_TRACE_SILK  [SMT-JUMPER_3_1-NC_TRACE_SILK]  95.5,107.19 90 top
JP90  JUMPER-SMT_3_1-NC_TRACE_SILK  [SMT-JUMPER_3_1-NC_TRACE_SILK]  98.04,107.19 90 top
JP91  JUMPER-SMT_3_1-NC_TRACE_SILK  [SMT-JUMPER_3_1-NC_TRACE_SILK]  20.83,125.48 90 top
JP92  JUMPER-SMT_3_1-NC_TRACE_SILK  [SMT-JUMPER_3_1-NC_TRACE_SILK]  18.29,125.48 90 top
JP93  JUMPER-SMT_3_1-NC_TRACE_SILK  [SMT-JUMPER_3_1-NC_TRACE_SILK]  15.75,125.48 90 top
JP94  JUMPER-SMT_3_1-NC_TRACE_SILK  [SMT-JUMPER_3_1-NC_TRACE_SILK]  23.37,125.48 90 top
JP95  JUMPER-SMT_3_1-NC_TRACE_SILK  [SMT-JUMPER_3_1-NC_TRACE_SILK]  25.91,125.48 90 top
JP96  JUMPER-SMT_3_1-NC_TRACE_SILK  [SMT-JUMPER_3_1-NC_TRACE_SILK]  56.9,125.48 90 top
JP97  JUMPER-SMT_3_1-NC_TRACE_SILK  [SMT-JUMPER_3_1-NC_TRACE_SILK]  54.36,125.48 90 top
JP98  JUMPER-SMT_3_1-NC_TRACE_SILK  [SMT-JUMPER_3_1-NC_TRACE_SILK]  51.82,125.48 90 top
JP99  JUMPER-SMT_3_1-NC_TRACE_SILK  [SMT-JUMPER_3_1-NC_TRACE_SILK]  59.44,125.48 90 top
JP100  JUMPER-SMT_3_1-NC_TRACE_SILK  [SMT-JUMPER_3_1-NC_TRACE_SILK]  61.98,125.48 90 top
JP101  JUMPER-SMT_3_1-NC_TRACE_SILK  [SMT-JUMPER_3_1-NC_TRACE_SILK]  92.96,125.48 90 top
JP102  JUMPER-SMT_3_1-NC_TRACE_SILK  [SMT-JUMPER_3_1-NC_TRACE_SILK]  90.42,125.48 90 top
JP103  JUMPER-SMT_3_1-NC_TRACE_SILK  [SMT-JUMPER_3_1-NC_TRACE_SILK]  87.88,125.48 90 top
JP104  JUMPER-SMT_3_1-NC_TRACE_SILK  [SMT-JUMPER_3_1-NC_TRACE_SILK]  95.5,125.48 90 top
JP105  JUMPER-SMT_3_1-NC_TRACE_SILK  [SMT-JUMPER_3_1-NC_TRACE_SILK]  98.04,125.48 90 top
JP106  JUMPER-SMT_3_1-NC_TRACE_SILK  [SMT-JUMPER_3_1-NC_TRACE_SILK]  20.83,143.76 90 top
JP107  JUMPER-SMT_3_1-NC_TRACE_SILK  [SMT-JUMPER_3_1-NC_TRACE_SILK]  18.29,143.76 90 top
JP108  JUMPER-SMT_3_1-NC_TRACE_SILK  [SMT-JUMPER_3_1-NC_TRACE_SILK]  15.75,143.76 90 top
JP109  JUMPER-SMT_3_1-NC_TRACE_SILK  [SMT-JUMPER_3_1-NC_TRACE_SILK]  23.37,143.76 90 top
JP110  JUMPER-SMT_3_1-NC_TRACE_SILK  [SMT-JUMPER_3_1-NC_TRACE_SILK]  25.91,143.76 90 top
JP111  JUMPER-SMT_3_1-NC_TRACE_SILK  [SMT-JUMPER_3_1-NC_TRACE_SILK]  56.9,143.76 90 top
JP112  JUMPER-SMT_3_1-NC_TRACE_SILK  [SMT-JUMPER_3_1-NC_TRACE_SILK]  54.36,143.76 90 top
JP113  JUMPER-SMT_3_1-NC_TRACE_SILK  [SMT-JUMPER_3_1-NC_TRACE_SILK]  51.82,143.76 90 top
JP114  JUMPER-SMT_3_1-NC_TRACE_SILK  [SMT-JUMPER_3_1-NC_TRACE_SILK]  59.44,143.76 90 top
JP115  JUMPER-SMT_3_1-NC_TRACE_SILK  [SMT-JUMPER_3_1-NC_TRACE_SILK]  61.98,143.76 90 top
JP116  JUMPER-SMT_3_1-NC_TRACE_SILK  [SMT-JUMPER_3_1-NC_TRACE_SILK]  92.96,143.76 90 top
JP117  JUMPER-SMT_3_1-NC_TRACE_SILK  [SMT-JUMPER_3_1-NC_TRACE_SILK]  90.42,143.76 90 top
JP118  JUMPER-SMT_3_1-NC_TRACE_SILK  [SMT-JUMPER_3_1-NC_TRACE_SILK]  87.88,143.76 90 top
JP119  JUMPER-SMT_3_1-NC_TRACE_SILK  [SMT-JUMPER_3_1-NC_TRACE_SILK]  95.5,143.76 90 top
JP120  JUMPER-SMT_3_1-NC_TRACE_SILK  [SMT-JUMPER_3_1-NC_TRACE_SILK]  98.04,143.76 90 top
LOGO1  SFE_LOGO_FLAME.1_INCH  [SFE_LOGO_FLAME_.1]  16.14,9.72 0 bottom
LOGO2  OSHW-LOGOS  [OSHW-LOGO-S]  40.64,18.1 90 top
LOGO3  SFE_LOGO_NAME_FLAME.1_INCH  [SFE_LOGO_NAME_FLAME_.1]  35.55,9.64 90 top
LOGO4  SFE_LOGO_FLAME.1_INCH  [SFE_LOGO_FLAME_.1]  52.21,9.72 0 bottom
LOGO5  OSHW-LOGOS  [OSHW-LOGO-S]  76.71,18.1 90 top
LOGO6  SFE_LOGO_NAME_FLAME.1_INCH  [SFE_LOGO_NAME_FLAME_.1]  71.62,9.64 90 top
LOGO7  SFE_LOGO_FLAME.1_INCH  [SFE_LOGO_FLAME_.1]  88.28,9.72 0 bottom
LOGO8  OSHW-LOGOS  [OSHW-LOGO-S]  112.78,18.1 90 top
LOGO9  SFE_LOGO_NAME_FLAME.1_INCH  [SFE_LOGO_NAME_FLAME_.1]  107.69,9.64 90 top
LOGO10  SFE_LOGO_FLAME.1_INCH  [SFE_LOGO_FLAME_.1]  16.14,28 0 bottom
LOGO11  OSHW-LOGOS  [OSHW-LOGO-S]  40.64,36.39 90 top
LOGO12  SFE_LOGO_NAME_FLAME.1_INCH  [SFE_LOGO_NAME_FLAME_.1]  35.55,27.93 90 top
LOGO13  SFE_LOGO_FLAME.1_INCH  [SFE_LOGO_FLAME_.1]  52.21,28 0 bottom
LOGO14  OSHW-LOGOS  [OSHW-LOGO-S]  76.71,36.39 90 top
LOGO15  SFE_LOGO_NAME_FLAME.1_INCH  [SFE_LOGO_NAME_FLAME_.1]  71.62,27.93 90 top
LOGO16  SFE_LOGO_FLAME.1_INCH  [SFE_LOGO_FLAME_.1]  88.28,28 0 bottom
LOGO17  OSHW-LOGOS  [OSHW-LOGO-S]  112.78,36.39 90 top
LOGO18  SFE_LOGO_NAME_FLAME.1_INCH  [SFE_LOGO_NAME_FLAME_.1]  107.69,27.93 90 top
LOGO19  SFE_LOGO_FLAME.1_INCH  [SFE_LOGO_FLAME_.1]  16.14,46.29 0 bottom
LOGO20  OSHW-LOGOS  [OSHW-LOGO-S]  40.64,54.67 90 top
LOGO21  SFE_LOGO_NAME_FLAME.1_INCH  [SFE_LOGO_NAME_FLAME_.1]  35.55,46.22 90 top
LOGO22  SFE_LOGO_FLAME.1_INCH  [SFE_LOGO_FLAME_.1]  52.21,46.29 0 bottom
LOGO23  OSHW-LOGOS  [OSHW-LOGO-S]  76.71,54.67 90 top
LOGO24  SFE_LOGO_NAME_FLAME.1_INCH  [SFE_LOGO_NAME_FLAME_.1]  71.62,46.22 90 top
LOGO25  SFE_LOGO_FLAME.1_INCH  [SFE_LOGO_FLAME_.1]  88.28,46.29 0 bottom
LOGO26  OSHW-LOGOS  [OSHW-LOGO-S]  112.78,54.67 90 top
LOGO27  SFE_LOGO_NAME_FLAME.1_INCH  [SFE_LOGO_NAME_FLAME_.1]  107.69,46.22 90 top
LOGO28  SFE_LOGO_FLAME.1_INCH  [SFE_LOGO_FLAME_.1]  16.14,64.58 0 bottom
LOGO29  OSHW-LOGOS  [OSHW-LOGO-S]  40.64,72.96 90 top
LOGO30  SFE_LOGO_NAME_FLAME.1_INCH  [SFE_LOGO_NAME_FLAME_.1]  35.55,64.51 90 top
LOGO31  SFE_LOGO_FLAME.1_INCH  [SFE_LOGO_FLAME_.1]  52.21,64.58 0 bottom
LOGO32  OSHW-LOGOS  [OSHW-LOGO-S]  76.71,72.96 90 top
LOGO33  SFE_LOGO_NAME_FLAME.1_INCH  [SFE_LOGO_NAME_FLAME_.1]  71.62,64.51 90 top
LOGO34  SFE_LOGO_FLAME.1_INCH  [SFE_LOGO_FLAME_.1]  88.28,64.58 0 bottom
LOGO35  OSHW-LOGOS  [OSHW-LOGO-S]  112.78,72.96 90 top
LOGO36  SFE_LOGO_NAME_FLAME.1_INCH  [SFE_LOGO_NAME_FLAME_.1]  107.69,64.51 90 top
LOGO37  SFE_LOGO_FLAME.1_INCH  [SFE_LOGO_FLAME_.1]  16.14,82.87 0 bottom
LOGO38  OSHW-LOGOS  [OSHW-LOGO-S]  40.64,91.25 90 top
LOGO39  SFE_LOGO_NAME_FLAME.1_INCH  [SFE_LOGO_NAME_FLAME_.1]  35.55,82.8 90 top
LOGO40  SFE_LOGO_FLAME.1_INCH  [SFE_LOGO_FLAME_.1]  52.21,82.87 0 bottom
LOGO41  OSHW-LOGOS  [OSHW-LOGO-S]  76.71,91.25 90 top
LOGO42  SFE_LOGO_NAME_FLAME.1_INCH  [SFE_LOGO_NAME_FLAME_.1]  71.62,82.8 90 top
LOGO43  SFE_LOGO_FLAME.1_INCH  [SFE_LOGO_FLAME_.1]  88.28,82.87 0 bottom
LOGO44  OSHW-LOGOS  [OSHW-LOGO-S]  112.78,91.25 90 top
LOGO45  SFE_LOGO_NAME_FLAME.1_INCH  [SFE_LOGO_NAME_FLAME_.1]  107.69,82.8 90 top
LOGO46  SFE_LOGO_FLAME.1_INCH  [SFE_LOGO_FLAME_.1]  16.14,101.16 0 bottom
LOGO47  OSHW-LOGOS  [OSHW-LOGO-S]  40.64,109.54 90 top
LOGO48  SFE_LOGO_NAME_FLAME.1_INCH  [SFE_LOGO_NAME_FLAME_.1]  35.55,101.08 90 top
LOGO49  SFE_LOGO_FLAME.1_INCH  [SFE_LOGO_FLAME_.1]  52.21,101.16 0 bottom
LOGO50  OSHW-LOGOS  [OSHW-LOGO-S]  76.71,109.54 90 top
LOGO51  SFE_LOGO_NAME_FLAME.1_INCH  [SFE_LOGO_NAME_FLAME_.1]  71.62,101.08 90 top
LOGO52  SFE_LOGO_FLAME.1_INCH  [SFE_LOGO_FLAME_.1]  88.28,101.16 0 bottom
LOGO53  OSHW-LOGOS  [OSHW-LOGO-S]  112.78,109.54 90 top
LOGO54  SFE_LOGO_NAME_FLAME.1_INCH  [SFE_LOGO_NAME_FLAME_.1]  107.69,101.08 90 top
LOGO55  SFE_LOGO_FLAME.1_INCH  [SFE_LOGO_FLAME_.1]  16.14,119.44 0 bottom
LOGO56  OSHW-LOGOS  [OSHW-LOGO-S]  40.64,127.83 90 top
LOGO57  SFE_LOGO_NAME_FLAME.1_INCH  [SFE_LOGO_NAME_FLAME_.1]  35.55,119.37 90 top
LOGO58  SFE_LOGO_FLAME.1_INCH  [SFE_LOGO_FLAME_.1]  52.21,119.44 0 bottom
LOGO59  OSHW-LOGOS  [OSHW-LOGO-S]  76.71,127.83 90 top
LOGO60  SFE_LOGO_NAME_FLAME.1_INCH  [SFE_LOGO_NAME_FLAME_.1]  71.62,119.37 90 top
LOGO61  SFE_LOGO_FLAME.1_INCH  [SFE_LOGO_FLAME_.1]  88.28,119.44 0 bottom
LOGO62  OSHW-LOGOS  [OSHW-LOGO-S]  112.78,127.83 90 top
LOGO63  SFE_LOGO_NAME_FLAME.1_INCH  [SFE_LOGO_NAME_FLAME_.1]  107.69,119.37 90 top
LOGO64  SFE_LOGO_FLAME.1_INCH  [SFE_LOGO_FLAME_.1]  16.14,137.73 0 bottom
LOGO65  OSHW-LOGOS  [OSHW-LOGO-S]  40.64,146.11 90 top
LOGO66  SFE_LOGO_NAME_FLAME.1_INCH  [SFE_LOGO_NAME_FLAME_.1]  35.55,137.66 90 top
LOGO67  SFE_LOGO_FLAME.1_INCH  [SFE_LOGO_FLAME_.1]  52.21,137.73 0 bottom
LOGO68  OSHW-LOGOS  [OSHW-LOGO-S]  76.71,146.11 90 top
LOGO69  SFE_LOGO_NAME_FLAME.1_INCH  [SFE_LOGO_NAME_FLAME_.1]  71.62,137.66 90 top
LOGO70  SFE_LOGO_FLAME.1_INCH  [SFE_LOGO_FLAME_.1]  88.28,137.73 0 bottom
LOGO71  OSHW-LOGOS  [OSHW-LOGO-S]  112.78,146.11 90 top
LOGO72  SFE_LOGO_NAME_FLAME.1_INCH  [SFE_LOGO_NAME_FLAME_.1]  107.69,137.66 90 top
OLED1  32x128 OLED  [OLED-UG-2832TSWGG01-REAR]  34.04,21.46 0 top
OLED2  32x128 OLED  [OLED-UG-2832TSWGG01-REAR]  70.1,21.46 0 top
OLED3  32x128 OLED  [OLED-UG-2832TSWGG01-REAR]  106.17,21.46 0 top
OLED4  32x128 OLED  [OLED-UG-2832TSWGG01-REAR]  34.04,39.75 0 top
OLED5  32x128 OLED  [OLED-UG-2832TSWGG01-REAR]  70.1,39.75 0 top
OLED6  32x128 OLED  [OLED-UG-2832TSWGG01-REAR]  106.17,39.75 0 top
OLED7  32x128 OLED  [OLED-UG-2832TSWGG01-REAR]  34.04,58.04 0 top
OLED8  32x128 OLED  [OLED-UG-2832TSWGG01-REAR]  70.1,58.04 0 top
OLED9  32x128 OLED  [OLED-UG-2832TSWGG01-REAR]  106.17,58.04 0 top
OLED10  32x128 OLED  [OLED-UG-2832TSWGG01-REAR]  34.04,76.33 0 top
OLED11  32x128 OLED  [OLED-UG-2832TSWGG01-REAR]  70.1,76.33 0 top
OLED12  32x128 OLED  [OLED-UG-2832TSWGG01-REAR]  106.17,76.33 0 top
OLED13  32x128 OLED  [OLED-UG-2832TSWGG01-REAR]  34.04,94.61 0 top
OLED14  32x128 OLED  [OLED-UG-2832TSWGG01-REAR]  70.1,94.61 0 top
OLED15  32x128 OLED  [OLED-UG-2832TSWGG01-REAR]  106.17,94.61 0 top
OLED16  32x128 OLED  [OLED-UG-2832TSWGG01-REAR]  34.04,112.9 0 top
OLED17  32x128 OLED  [OLED-UG-2832TSWGG01-REAR]  70.1,112.9 0 top
OLED18  32x128 OLED  [OLED-UG-2832TSWGG01-REAR]  106.17,112.9 0 top
OLED19  32x128 OLED  [OLED-UG-2832TSWGG01-REAR]  34.04,131.19 0 top
OLED20  32x128 OLED  [OLED-UG-2832TSWGG01-REAR]  70.1,131.19 0 top
OLED21  32x128 OLED  [OLED-UG-2832TSWGG01-REAR]  106.17,131.19 0 top
OLED22  32x128 OLED  [OLED-UG-2832TSWGG01-REAR]  34.04,149.48 0 top
OLED23  32x128 OLED  [OLED-UG-2832TSWGG01-REAR]  70.1,149.48 0 top
OLED24  32x128 OLED  [OLED-UG-2832TSWGG01-REAR]  106.17,149.48 0 top
R1  390k  [0603]  24.64,18.92 0 bottom
R2  390k  [0603]  60.71,18.92 0 bottom
R3  4.7k  [0603]  63.25,10.67 180 bottom
R4  4.7k  [0603]  27.18,10.67 180 bottom
R5  390k  [0603]  96.77,18.92 0 bottom
R6  4.7k  [0603]  99.31,10.67 180 bottom
R7  390k  [0603]  24.64,37.21 0 bottom
R8  4.7k  [0603]  27.18,28.96 180 bottom
R9  390k  [0603]  60.71,37.21 0 bottom
R10  4.7k  [0603]  63.25,28.96 180 bottom
R11  390k  [0603]  96.77,37.21 0 bottom
R12  4.7k  [0603]  99.31,28.96 180 bottom
R13  390k  [0603]  24.64,55.5 0 bottom
R14  4.7k  [0603]  27.18,47.24 180 bottom
R15  390k  [0603]  60.71,55.5 0 bottom
R16  4.7k  [0603]  63.25,47.24 180 bottom
R17  390k  [0603]  96.77,55.5 0 bottom
R18  4.7k  [0603]  99.31,47.24 180 bottom
R19  390k  [0603]  24.64,73.79 0 bottom
R20  4.7k  [0603]  27.18,65.53 180 bottom
R21  390k  [0603]  60.71,73.79 0 bottom
R22  4.7k  [0603]  63.25,65.53 180 bottom
R23  390k  [0603]  96.77,73.79 0 bottom
R24  4.7k  [0603]  99.31,65.53 180 bottom
R25  390k  [0603]  24.64,92.08 0 bottom
R26  4.7k  [0603]  27.18,83.82 180 bottom
R27  390k  [0603]  60.71,92.08 0 bottom
R28  4.7k  [0603]  63.25,83.82 180 bottom
R29  390k  [0603]  96.77,92.08 0 bottom
R30  4.7k  [0603]  99.31,83.82 180 bottom
R31  390k  [0603]  24.64,110.36 0 bottom
R32  4.7k  [0603]  27.18,102.11 180 bottom
R33  390k  [0603]  60.71,110.36 0 bottom
R34  4.7k  [0603]  63.25,102.11 180 bottom
R35  390k  [0603]  96.77,110.36 0 bottom
R36  4.7k  [0603]  99.31,102.11 180 bottom
R37  390k  [0603]  24.64,128.65 0 bottom
R38  4.7k  [0603]  27.18,120.4 180 bottom
R39  390k  [0603]  60.71,128.65 0 bottom
R40  4.7k  [0603]  63.25,120.4 180 bottom
R41  390k  [0603]  96.77,128.65 0 bottom
R42  4.7k  [0603]  99.31,120.4 180 bottom
R43  390k  [0603]  24.64,146.94 0 bottom
R44  4.7k  [0603]  27.18,138.68 180 bottom
R45  390k  [0603]  60.71,146.94 0 bottom
R46  4.7k  [0603]  63.25,138.68 180 bottom
R47  390k  [0603]  96.77,146.94 0 bottom
R48  4.7k  [0603]  99.31,138.68 180 bottom
TP1  TEST-POINTTP_15TH_THRU  [TP_15TH]  37.34,20.83 0 bottom
TP2  TEST-POINTTP_15TH_THRU  [TP_15TH]  73.41,20.83 0 bottom
TP3  TEST-POINTTP_15TH_THRU  [TP_15TH]  109.47,20.83 0 bottom
TP4  TEST-POINTTP_15TH_THRU  [TP_15TH]  37.34,39.12 0 bottom
TP5  TEST-POINTTP_15TH_THRU  [TP_15TH]  73.41,39.12 0 bottom
TP6  TEST-POINTTP_15TH_THRU  [TP_15TH]  109.47,39.12 0 bottom
TP7  TEST-POINTTP_15TH_THRU  [TP_15TH]  37.34,57.4 0 bottom
TP8  TEST-POINTTP_15TH_THRU  [TP_15TH]  73.41,57.4 0 bottom
TP9  TEST-POINTTP_15TH_THRU  [TP_15TH]  109.47,57.4 0 bottom
TP10  TEST-POINTTP_15TH_THRU  [TP_15TH]  37.34,75.69 0 bottom
TP11  TEST-POINTTP_15TH_THRU  [TP_15TH]  73.41,75.69 0 bottom
TP12  TEST-POINTTP_15TH_THRU  [TP_15TH]  109.47,75.69 0 bottom
TP13  TEST-POINTTP_15TH_THRU  [TP_15TH]  37.34,93.98 0 bottom
TP14  TEST-POINTTP_15TH_THRU  [TP_15TH]  73.41,93.98 0 bottom
TP15  TEST-POINTTP_15TH_THRU  [TP_15TH]  109.47,93.98 0 bottom
TP16  TEST-POINTTP_15TH_THRU  [TP_15TH]  37.34,112.27 0 bottom
TP17  TEST-POINTTP_15TH_THRU  [TP_15TH]  73.41,112.27 0 bottom
TP18  TEST-POINTTP_15TH_THRU  [TP_15TH]  109.47,112.27 0 bottom
TP19  TEST-POINTTP_15TH_THRU  [TP_15TH]  37.34,130.56 0 bottom
TP20  TEST-POINTTP_15TH_THRU  [TP_15TH]  73.41,130.56 0 bottom
TP21  TEST-POINTTP_15TH_THRU  [TP_15TH]  109.47,130.56 0 bottom
TP22  TEST-POINTTP_15TH_THRU  [TP_15TH]  37.34,148.84 0 bottom
TP23  TEST-POINTTP_15TH_THRU  [TP_15TH]  73.41,148.84 0 bottom
TP24  TEST-POINTTP_15TH_THRU  [TP_15TH]  109.47,148.84 0 bottom

## Library data of the parts
C1-C4 C7-C10 C13-C16 C19-C22 C25-C28 C31-C34 C37-C40 C43-C46 C49-C52 C55-C58 C61-C64 C67-C70 C73-C76 C79-C82 C85-C88 C91-C94 C97-C100 C103-C106 C109-C112 C115-C118 C121-C124 C127-C130 C133-C136 C139-C142 = SparkFun-Capacitors; PROD_ID: CAP-12417
C5 C11 C17 C23 C29 C35 C41 C47 C53 C59 C65 C71 C77 C83 C89 C95 C101 C107 C113 C119 C125 C131 C137 C143 = SparkFun-Capacitors; PROD_ID: CAP-11624
C6 C12 C18 C24 C30 C36 C42 C48 C54 C60 C66 C72 C78 C84 C90 C96 C102 C108 C114 C120 C126 C132 C138 C144 = SparkFun-Capacitors; PROD_ID: CAP-10300
E$1 = SparkFun-Retired
E$7 E$8 FD1-FD48 LOGO1-LOGO72 = SparkFun-Aesthetics
J1-J48 TP1-TP24 = SparkFun-Connectors
JP1-JP120 = SparkFun-Jumpers
OLED1-OLED24 = TeensyViewDev; PROD_ID: LCD-13577
R1 R2 R5 R7 R9 R11 R13 R15 R17 R19 R21 R23 R25 R27 R29 R31 R33 R35 R37 R39 R41 R43 R45 R47 = SparkFun-Resistors; PROD_ID: RES-12024
R3 R4 R6 R8 R10 R12 R14 R16 R18 R20 R22 R24 R26 R28 R30 R32 R34 R36 R38 R40 R42 R44 R46 R48 = SparkFun-Resistors; PROD_ID: RES-07857

## Nets
!CS: JP1.2 OLED1.8 R4.1
!CS1: JP6.2 OLED2.8 R3.1
!CS2: JP11.2 OLED3.8 R6.1
!CS3: JP16.2 OLED4.8 R8.1
!CS4: JP21.2 OLED5.8 R10.1
!CS5: JP26.2 OLED6.8 R12.1
!CS6: JP31.2 OLED7.8 R14.1
!CS7: JP36.2 OLED8.8 R16.1
!CS8: JP41.2 OLED9.8 R18.1
!CS9: JP46.2 OLED10.8 R20.1
!CS10: JP51.2 OLED11.8 R22.1
!CS11: JP56.2 OLED12.8 R24.1
!CS12: JP61.2 OLED13.8 R26.1
!CS13: JP66.2 OLED14.8 R28.1
!CS14: JP71.2 OLED15.8 R30.1
!CS15: JP76.2 OLED16.8 R32.1
!CS16: JP81.2 OLED17.8 R34.1
!CS17: JP86.2 OLED18.8 R36.1
!CS18: JP91.2 OLED19.8 R38.1
!CS19: JP96.2 OLED20.8 R40.1
!CS20: JP101.2 OLED21.8 R42.1
!CS21: JP106.2 OLED22.8 R44.1
!CS22: JP111.2 OLED23.8 R46.1
!CS23: JP116.2 OLED24.8 R48.1
!RESET: JP4.2 OLED1.9
!RESET1: JP9.2 OLED2.9
!RESET2: JP14.2 OLED3.9
!RESET3: JP19.2 OLED4.9
!RESET4: JP24.2 OLED5.9
!RESET5: JP29.2 OLED6.9
!RESET6: JP34.2 OLED7.9
!RESET7: JP39.2 OLED8.9
!RESET8: JP44.2 OLED9.9
!RESET9: JP49.2 OLED10.9
!RESET10: JP54.2 OLED11.9
!RESET11: JP59.2 OLED12.9
!RESET12: JP64.2 OLED13.9
!RESET13: JP69.2 OLED14.9
!RESET14: JP74.2 OLED15.9
!RESET15: JP79.2 OLED16.9
!RESET16: JP84.2 OLED17.9
!RESET17: JP89.2 OLED18.9
!RESET18: JP94.2 OLED19.9
!RESET19: JP99.2 OLED20.9
!RESET20: JP104.2 OLED21.9
!RESET21: JP109.2 OLED22.9
!RESET22: JP114.2 OLED23.9
!RESET23: JP119.2 OLED24.9
D/!C: JP5.2 OLED1.10
D/!C1: JP10.2 OLED2.10
D/!C2: JP15.2 OLED3.10
D/!C3: JP20.2 OLED4.10
D/!C4: JP25.2 OLED5.10
D/!C5: JP30.2 OLED6.10
D/!C6: JP35.2 OLED7.10
D/!C7: JP40.2 OLED8.10
D/!C8: JP45.2 OLED9.10
D/!C9: JP50.2 OLED10.10
D/!C10: JP55.2 OLED11.10
D/!C11: JP60.2 OLED12.10
D/!C12: JP65.2 OLED13.10
D/!C13: JP70.2 OLED14.10
D/!C14: JP75.2 OLED15.10
D/!C15: JP80.2 OLED16.10
D/!C16: JP85.2 OLED17.10
D/!C17: JP90.2 OLED18.10
D/!C18: JP95.2 OLED19.10
D/!C19: JP100.2 OLED20.10
D/!C20: JP105.2 OLED21.10
D/!C21: JP110.2 OLED22.10
D/!C22: JP115.2 OLED23.10
D/!C23: JP120.2 OLED24.10
GND: C1.2 C2.2 C5.2 C6.2 J1.1 OLED1.6 R1.1
GND1: C7.2 C8.2 C11.2 C12.2 J3.1 OLED2.6 R2.1
GND2: C13.2 C14.2 C17.2 C18.2 J5.1 OLED3.6 R5.1
GND3: C19.2 C20.2 C23.2 C24.2 J7.1 OLED4.6 R7.1
GND4: C25.2 C26.2 C29.2 C30.2 J9.1 OLED5.6 R9.1
GND5: C31.2 C32.2 C35.2 C36.2 J11.1 OLED6.6 R11.1
GND6: C37.2 C38.2 C41.2 C42.2 J13.1 OLED7.6 R13.1
GND7: C43.2 C44.2 C47.2 C48.2 J15.1 OLED8.6 R15.1
GND8: C49.2 C50.2 C53.2 C54.2 J17.1 OLED9.6 R17.1
GND9: C55.2 C56.2 C59.2 C60.2 J19.1 OLED10.6 R19.1
GND10: C61.2 C62.2 C65.2 C66.2 J21.1 OLED11.6 R21.1
GND11: C67.2 C68.2 C71.2 C72.2 J23.1 OLED12.6 R23.1
GND12: C73.2 C74.2 C77.2 C78.2 J25.1 OLED13.6 R25.1
GND13: C79.2 C80.2 C83.2 C84.2 J27.1 OLED14.6 R27.1
GND14: C85.2 C86.2 C89.2 C90.2 J29.1 OLED15.6 R29.1
GND15: C91.2 C92.2 C95.2 C96.2 J31.1 OLED16.6 R31.1
GND16: C97.2 C98.2 C101.2 C102.2 J33.1 OLED17.6 R33.1
GND17: C103.2 C104.2 C107.2 C108.2 J35.1 OLED18.6 R35.1
GND18: C109.2 C110.2 C113.2 C114.2 J37.1 OLED19.6 R37.1
GND19: C115.2 C116.2 C119.2 C120.2 J39.1 OLED20.6 R39.1
GND20: C121.2 C122.2 C125.2 C126.2 J41.1 OLED21.6 R41.1
GND21: C127.2 C128.2 C131.2 C132.2 J43.1 OLED22.6 R43.1
GND22: C133.2 C134.2 C137.2 C138.2 J45.1 OLED23.6 R45.1
GND23: C139.2 C140.2 C143.2 C144.2 J47.1 OLED24.6 R47.1
N$1: J1.12 JP1.3
N$2: J2.8 JP1.1
N$3: C4.2 OLED1.4
N$4: C4.1 OLED1.3
N$5: C3.2 OLED1.2
N$6: C3.1 OLED1.1
N$7: OLED1.13 R1.2
N$8: C6.1 OLED1.14
N$9: C5.1 OLED1.15 TP1.P$1
N$10: J2.1 JP3.3
N$11: J2.2 JP3.1
N$12: J1.13 JP2.3
N$13: J1.9 JP2.1
N$14: J2.3 JP4.3
N$15: J1.4 JP4.1
N$16: J1.7 JP5.3
N$17: J2.9 JP5.1
N$18: C10.2 OLED2.4
N$19: C10.1 OLED2.3
N$20: C9.2 OLED2.2
N$21: C9.1 OLED2.1
N$22: OLED2.13 R2.2
N$23: C12.1 OLED2.14
N$24: C11.1 OLED2.15 TP2.P$1
N$25: J3.12 JP6.3
N$26: J4.2 JP8.1
N$27: J4.1 JP8.3
N$28: J3.13 JP7.3
N$29: J3.9 JP7.1
N$30: J4.8 JP6.1
N$31: J4.3 JP9.3
N$32: J3.4 JP9.1
N$33: J3.7 JP10.3
N$34: J4.9 JP10.1
N$35: C16.2 OLED3.4
N$36: C16.1 OLED3.3
N$37: C15.2 OLED3.2
N$38: C15.1 OLED3.1
N$39: OLED3.13 R5.2
N$40: C18.1 OLED3.14
N$41: C17.1 OLED3.15 TP3.P$1
N$42: J5.12 JP11.3
N$43: J6.2 JP13.1
N$44: J6.1 JP13.3
N$45: J5.13 JP12.3
N$46: J5.9 JP12.1
N$47: J6.8 JP11.1
N$48: J6.3 JP14.3
N$49: J5.4 JP14.1
N$50: J5.7 JP15.3
N$51: J6.9 JP15.1
N$52: C22.2 OLED4.4
N$53: C22.1 OLED4.3
N$54: C21.2 OLED4.2
N$55: C21.1 OLED4.1
N$56: OLED4.13 R7.2
N$57: C24.1 OLED4.14
N$58: C23.1 OLED4.15 TP4.P$1
N$59: J7.12 JP16.3
N$60: J8.2 JP18.1
N$61: J8.1 JP18.3
N$62: J7.13 JP17.3
N$63: J7.9 JP17.1
N$64: J8.8 JP16.1
N$65: J8.3 JP19.3
N$66: J7.4 JP19.1
N$67: J7.7 JP20.3
N$68: J8.9 JP20.1
N$69: C28.2 OLED5.4
N$70: C28.1 OLED5.3
N$71: C27.2 OLED5.2
N$72: C27.1 OLED5.1
N$73: OLED5.13 R9.2
N$74: C30.1 OLED5.14
N$75: C29.1 OLED5.15 TP5.P$1
N$76: J9.12 JP21.3
N$77: J10.2 JP23.1
N$78: J10.1 JP23.3
N$79: J9.13 JP22.3
N$80: J9.9 JP22.1
N$81: J10.8 JP21.1
N$82: J10.3 JP24.3
N$83: J9.4 JP24.1
N$84: J9.7 JP25.3
N$85: J10.9 JP25.1
N$86: C34.2 OLED6.4
N$87: C34.1 OLED6.3
N$88: C33.2 OLED6.2
N$89: C33.1 OLED6.1
N$90: OLED6.13 R11.2
N$91: C36.1 OLED6.14
N$92: C35.1 OLED6.15 TP6.P$1
N$93: J11.12 JP26.3
N$94: J12.2 JP28.1
N$95: J12.1 JP28.3
N$96: J11.13 JP27.3
N$97: J11.9 JP27.1
N$98: J12.8 JP26.1
N$99: J12.3 JP29.3
N$100: J11.4 JP29.1
N$101: J11.7 JP30.3
N$102: J12.9 JP30.1
N$103: C40.2 OLED7.4
N$104: C40.1 OLED7.3
N$105: C39.2 OLED7.2
N$106: C39.1 OLED7.1
N$107: OLED7.13 R13.2
N$108: C42.1 OLED7.14
N$109: C41.1 OLED7.15 TP7.P$1
N$110: J13.12 JP31.3
N$111: J14.2 JP33.1
N$112: J14.1 JP33.3
N$113: J13.13 JP32.3
N$114: J13.9 JP32.1
N$115: J14.8 JP31.1
N$116: J14.3 JP34.3
N$117: J13.4 JP34.1
N$118: J13.7 JP35.3
N$119: J14.9 JP35.1
N$120: C46.2 OLED8.4
N$121: C46.1 OLED8.3
N$122: C45.2 OLED8.2
N$123: C45.1 OLED8.1
N$124: OLED8.13 R15.2
N$125: C48.1 OLED8.14
N$126: C47.1 OLED8.15 TP8.P$1
N$127: J15.12 JP36.3
N$128: J16.2 JP38.1
N$129: J16.1 JP38.3
N$130: J15.13 JP37.3
N$131: J15.9 JP37.1
N$132: J16.8 JP36.1
N$133: J16.3 JP39.3
N$134: J15.4 JP39.1
N$135: J15.7 JP40.3
N$136: J16.9 JP40.1
N$137: C52.2 OLED9.4
N$138: C52.1 OLED9.3
N$139: C51.2 OLED9.2
N$140: C51.1 OLED9.1
N$141: OLED9.13 R17.2
N$142: C54.1 OLED9.14
N$143: C53.1 OLED9.15 TP9.P$1
N$144: J17.12 JP41.3
N$145: J18.2 JP43.1
N$146: J18.1 JP43.3
N$147: J17.13 JP42.3
N$148: J17.9 JP42.1
N$149: J18.8 JP41.1
N$150: J18.3 JP44.3
N$151: J17.4 JP44.1
N$152: J17.7 JP45.3
N$153: J18.9 JP45.1
N$154: C58.2 OLED10.4
N$155: C58.1 OLED10.3
N$156: C57.2 OLED10.2
N$157: C57.1 OLED10.1
N$158: OLED10.13 R19.2
N$159: C60.1 OLED10.14
N$160: C59.1 OLED10.15 TP10.P$1
N$161: J19.12 JP46.3
N$162: J20.2 JP48.1
N$163: J20.1 JP48.3
N$164: J19.13 JP47.3
N$165: J19.9 JP47.1
N$166: J20.8 JP46.1
N$167: J20.3 JP49.3
N$168: J19.4 JP49.1
N$169: J19.7 JP50.3
N$170: J20.9 JP50.1
N$171: C64.2 OLED11.4
N$172: C64.1 OLED11.3
N$173: C63.2 OLED11.2
N$174: C63.1 OLED11.1
N$175: OLED11.13 R21.2
N$176: C66.1 OLED11.14
N$177: C65.1 OLED11.15 TP11.P$1
N$178: J21.12 JP51.3
N$179: J22.2 JP53.1
N$180: J22.1 JP53.3
N$181: J21.13 JP52.3
N$182: J21.9 JP52.1
N$183: J22.8 JP51.1
N$184: J22.3 JP54.3
N$185: J21.4 JP54.1
N$186: J21.7 JP55.3
N$187: J22.9 JP55.1
N$188: C70.2 OLED12.4
N$189: C70.1 OLED12.3
N$190: C69.2 OLED12.2
N$191: C69.1 OLED12.1
N$192: OLED12.13 R23.2
N$193: C72.1 OLED12.14
N$194: C71.1 OLED12.15 TP12.P$1
N$195: J23.12 JP56.3
N$196: J24.2 JP58.1
N$197: J24.1 JP58.3
N$198: J23.13 JP57.3
N$199: J23.9 JP57.1
N$200: J24.8 JP56.1
N$201: J24.3 JP59.3
N$202: J23.4 JP59.1
N$203: J23.7 JP60.3
N$204: J24.9 JP60.1
N$205: C76.2 OLED13.4
N$206: C76.1 OLED13.3
N$207: C75.2 OLED13.2
N$208: C75.1 OLED13.1
N$209: OLED13.13 R25.2
N$210: C78.1 OLED13.14
N$211: C77.1 OLED13.15 TP13.P$1
N$212: J25.12 JP61.3
N$213: J26.2 JP63.1
N$214: J26.1 JP63.3
N$215: J25.13 JP62.3
N$216: J25.9 JP62.1
N$217: J26.8 JP61.1
N$218: J26.3 JP64.3
N$219: J25.4 JP64.1
N$220: J25.7 JP65.3
N$221: J26.9 JP65.1
N$222: C82.2 OLED14.4
N$223: C82.1 OLED14.3
N$224: C81.2 OLED14.2
N$225: C81.1 OLED14.1
N$226: OLED14.13 R27.2
N$227: C84.1 OLED14.14
N$228: C83.1 OLED14.15 TP14.P$1
N$229: J27.12 JP66.3
N$230: J28.2 JP68.1
N$231: J28.1 JP68.3
N$232: J27.13 JP67.3
N$233: J27.9 JP67.1
N$234: J28.8 JP66.1
N$235: J28.3 JP69.3
N$236: J27.4 JP69.1
N$237: J27.7 JP70.3
N$238: J28.9 JP70.1
N$239: C88.2 OLED15.4
N$240: C88.1 OLED15.3
N$241: C87.2 OLED15.2
N$242: C87.1 OLED15.1
N$243: OLED15.13 R29.2
N$244: C90.1 OLED15.14
N$245: C89.1 OLED15.15 TP15.P$1
N$246: J29.12 JP71.3
N$247: J30.2 JP73.1
N$248: J30.1 JP73.3
N$249: J29.13 JP72.3
N$250: J29.9 JP72.1
N$251: J30.8 JP71.1
N$252: J30.3 JP74.3
N$253: J29.4 JP74.1
N$254: J29.7 JP75.3
N$255: J30.9 JP75.1
N$256: C94.2 OLED16.4
N$257: C94.1 OLED16.3
N$258: C93.2 OLED16.2
N$259: C93.1 OLED16.1
N$260: OLED16.13 R31.2
N$261: C96.1 OLED16.14
N$262: C95.1 OLED16.15 TP16.P$1
N$263: J31.12 JP76.3
N$264: J32.2 JP78.1
N$265: J32.1 JP78.3
N$266: J31.13 JP77.3
N$267: J31.9 JP77.1
N$268: J32.8 JP76.1
N$269: J32.3 JP79.3
N$270: J31.4 JP79.1
N$271: J31.7 JP80.3
N$272: J32.9 JP80.1
N$273: C100.2 OLED17.4
N$274: C100.1 OLED17.3
N$275: C99.2 OLED17.2
N$276: C99.1 OLED17.1
N$277: OLED17.13 R33.2
N$278: C102.1 OLED17.14
N$279: C101.1 OLED17.15 TP17.P$1
N$280: J33.12 JP81.3
N$281: J34.2 JP83.1
N$282: J34.1 JP83.3
N$283: J33.13 JP82.3
N$284: J33.9 JP82.1
N$285: J34.8 JP81.1
N$286: J34.3 JP84.3
N$287: J33.4 JP84.1
N$288: J33.7 JP85.3
N$289: J34.9 JP85.1
N$290: C106.2 OLED18.4
N$291: C106.1 OLED18.3
N$292: C105.2 OLED18.2
N$293: C105.1 OLED18.1
N$294: OLED18.13 R35.2
N$295: C108.1 OLED18.14
N$296: C107.1 OLED18.15 TP18.P$1
N$297: J35.12 JP86.3
N$298: J36.2 JP88.1
N$299: J36.1 JP88.3
N$300: J35.13 JP87.3
N$301: J35.9 JP87.1
N$302: J36.8 JP86.1
N$303: J36.3 JP89.3
N$304: J35.4 JP89.1
N$305: J35.7 JP90.3
N$306: J36.9 JP90.1
N$307: C112.2 OLED19.4
N$308: C112.1 OLED19.3
N$309: C111.2 OLED19.2
N$310: C111.1 OLED19.1
N$311: OLED19.13 R37.2
N$312: C114.1 OLED19.14
N$313: C113.1 OLED19.15 TP19.P$1
N$314: J37.12 JP91.3
N$315: J38.2 JP93.1
N$316: J38.1 JP93.3
N$317: J37.13 JP92.3
N$318: J37.9 JP92.1
N$319: J38.8 JP91.1
N$320: J38.3 JP94.3
N$321: J37.4 JP94.1
N$322: J37.7 JP95.3
N$323: J38.9 JP95.1
N$324: C118.2 OLED20.4
N$325: C118.1 OLED20.3
N$326: C117.2 OLED20.2
N$327: C117.1 OLED20.1
N$328: OLED20.13 R39.2
N$329: C120.1 OLED20.14
N$330: C119.1 OLED20.15 TP20.P$1
N$331: J39.12 JP96.3
N$332: J40.2 JP98.1
N$333: J40.1 JP98.3
N$334: J39.13 JP97.3
N$335: J39.9 JP97.1
N$336: J40.8 JP96.1
N$337: J40.3 JP99.3
N$338: J39.4 JP99.1
N$339: J39.7 JP100.3
N$340: J40.9 JP100.1
N$341: C124.2 OLED21.4
N$342: C124.1 OLED21.3
N$343: C123.2 OLED21.2
N$344: C123.1 OLED21.1
N$345: OLED21.13 R41.2
N$346: C126.1 OLED21.14
N$347: C125.1 OLED21.15 TP21.P$1
N$348: J41.12 JP101.3
N$349: J42.2 JP103.1
N$350: J42.1 JP103.3
N$351: J41.13 JP102.3
N$352: J41.9 JP102.1
N$353: J42.8 JP101.1
N$354: J42.3 JP104.3
N$355: J41.4 JP104.1
N$356: J41.7 JP105.3
N$357: J42.9 JP105.1
N$358: C130.2 OLED22.4
N$359: C130.1 OLED22.3
N$360: C129.2 OLED22.2
N$361: C129.1 OLED22.1
N$362: OLED22.13 R43.2
N$363: C132.1 OLED22.14
N$364: C131.1 OLED22.15 TP22.P$1
N$365: J43.12 JP106.3
N$366: J44.2 JP108.1
N$367: J44.1 JP108.3
N$368: J43.13 JP107.3
N$369: J43.9 JP107.1
N$370: J44.8 JP106.1
N$371: J44.3 JP109.3
N$372: J43.4 JP109.1
N$373: J43.7 JP110.3
N$374: J44.9 JP110.1
N$375: C136.2 OLED23.4
N$376: C136.1 OLED23.3
N$377: C135.2 OLED23.2
N$378: C135.1 OLED23.1
N$379: OLED23.13 R45.2
N$380: C138.1 OLED23.14
N$381: C137.1 OLED23.15 TP23.P$1
N$382: J45.12 JP111.3
N$383: J46.2 JP113.1
N$384: J46.1 JP113.3
N$385: J45.13 JP112.3
N$386: J45.9 JP112.1
N$387: J46.8 JP111.1
N$388: J46.3 JP114.3
N$389: J45.4 JP114.1
N$390: J45.7 JP115.3
N$391: J46.9 JP115.1
N$392: C142.2 OLED24.4
N$393: C142.1 OLED24.3
N$394: C141.2 OLED24.2
N$395: C141.1 OLED24.1
N$396: OLED24.13 R47.2
N$397: C144.1 OLED24.14
N$398: C143.1 OLED24.15 TP24.P$1
N$399: J47.12 JP116.3
N$400: J48.2 JP118.1
N$401: J48.1 JP118.3
N$402: J47.13 JP117.3
N$403: J47.9 JP117.1
N$404: J48.8 JP116.1
N$405: J48.3 JP119.3
N$406: J47.4 JP119.1
N$407: J47.7 JP120.3
N$408: J48.9 JP120.1
SCLK: JP3.2 OLED1.11
SCLK1: JP8.2 OLED2.11
SCLK2: JP13.2 OLED3.11
SCLK3: JP18.2 OLED4.11
SCLK4: JP23.2 OLED5.11
SCLK5: JP28.2 OLED6.11
SCLK6: JP33.2 OLED7.11
SCLK7: JP38.2 OLED8.11
SCLK8: JP43.2 OLED9.11
SCLK9: JP48.2 OLED10.11
SCLK10: JP53.2 OLED11.11
SCLK11: JP58.2 OLED12.11
SCLK12: JP63.2 OLED13.11
SCLK13: JP68.2 OLED14.11
SCLK14: JP73.2 OLED15.11
SCLK15: JP78.2 OLED16.11
SCLK16: JP83.2 OLED17.11
SCLK17: JP88.2 OLED18.11
SCLK18: JP93.2 OLED19.11
SCLK19: JP98.2 OLED20.11
SCLK20: JP103.2 OLED21.11
SCLK21: JP108.2 OLED22.11
SCLK22: JP113.2 OLED23.11
SCLK23: JP118.2 OLED24.11
SDIN: JP2.2 OLED1.12
SDIN1: JP7.2 OLED2.12
SDIN2: JP12.2 OLED3.12
SDIN3: JP17.2 OLED4.12
SDIN4: JP22.2 OLED5.12
SDIN5: JP27.2 OLED6.12
SDIN6: JP32.2 OLED7.12
SDIN7: JP37.2 OLED8.12
SDIN8: JP42.2 OLED9.12
SDIN9: JP47.2 OLED10.12
SDIN10: JP52.2 OLED11.12
SDIN11: JP57.2 OLED12.12
SDIN12: JP62.2 OLED13.12
SDIN13: JP67.2 OLED14.12
SDIN14: JP72.2 OLED15.12
SDIN15: JP77.2 OLED16.12
SDIN16: JP82.2 OLED17.12
SDIN17: JP87.2 OLED18.12
SDIN18: JP92.2 OLED19.12
SDIN19: JP97.2 OLED20.12
SDIN20: JP102.2 OLED21.12
SDIN21: JP107.2 OLED22.12
SDIN22: JP112.2 OLED23.12
SDIN23: JP117.2 OLED24.12
VCC: C1.1 C2.1 J2.12 OLED1.5 OLED1.7 R4.2
VCC1: C7.1 C8.1 J4.12 OLED2.5 OLED2.7 R3.2
VCC2: C13.1 C14.1 J6.12 OLED3.5 OLED3.7 R6.2
VCC3: C19.1 C20.1 J8.12 OLED4.5 OLED4.7 R8.2
VCC4: C25.1 C26.1 J10.12 OLED5.5 OLED5.7 R10.2
VCC5: C31.1 C32.1 J12.12 OLED6.5 OLED6.7 R12.2
VCC6: C37.1 C38.1 J14.12 OLED7.5 OLED7.7 R14.2
VCC7: C43.1 C44.1 J16.12 OLED8.5 OLED8.7 R16.2
VCC8: C49.1 C50.1 J18.12 OLED9.5 OLED9.7 R18.2
VCC9: C55.1 C56.1 J20.12 OLED10.5 OLED10.7 R20.2
VCC10: C61.1 C62.1 J22.12 OLED11.5 OLED11.7 R22.2
VCC11: C67.1 C68.1 J24.12 OLED12.5 OLED12.7 R24.2
VCC12: C73.1 C74.1 J26.12 OLED13.5 OLED13.7 R26.2
VCC13: C79.1 C80.1 J28.12 OLED14.5 OLED14.7 R28.2
VCC14: C85.1 C86.1 J30.12 OLED15.5 OLED15.7 R30.2
VCC15: C91.1 C92.1 J32.12 OLED16.5 OLED16.7 R32.2
VCC16: C97.1 C98.1 J34.12 OLED17.5 OLED17.7 R34.2
VCC17: C103.1 C104.1 J36.12 OLED18.5 OLED18.7 R36.2
VCC18: C109.1 C110.1 J38.12 OLED19.5 OLED19.7 R38.2
VCC19: C115.1 C116.1 J40.12 OLED20.5 OLED20.7 R40.2
VCC20: C121.1 C122.1 J42.12 OLED21.5 OLED21.7 R42.2
VCC21: C127.1 C128.1 J44.12 OLED22.5 OLED22.7 R44.2
VCC22: C133.1 C134.1 J46.12 OLED23.5 OLED23.7 R46.2
VCC23: C139.1 C140.1 J48.12 OLED24.5 OLED24.7 R48.2

## Tracks (layer width: path | path; a pad name or v marks a point on that pad's centre or on a via)
!CS  (via drill 0.38)
  Top 0.254: v37.97,13.92 35.47,11.42 29.54,11.42 v28.96,12 | JP1.2 21.78,15.75 22.1,15.43 22.1,13.46 v22.86,12.7
  Bottom 0.254: OLED1.8 36.53,15.84 37.34,15.03 37.34,14.56 v37.97,13.92 | v28.96,12 28.57,11.62 26.61,11.62 26.33,11.34 R4.1 23.3,10.67 22.86,11.11 v22.86,12.7
!CS1  (via drill 0.38)
  Top 0.254: v74.04,13.92 71.54,11.42 65.6,11.42 v65.02,12 | JP6.2 57.85,15.75 58.17,15.43 58.17,13.46 v58.93,12.7
  Bottom 0.254: OLED2.8 72.6,15.84 73.41,15.03 73.41,14.56 v74.04,13.92 | v65.02,12 64.64,11.62 62.67,11.62 62.4,11.34 R3.1 59.37,10.67 58.93,11.11 v58.93,12.7
!CS2  (via drill 0.38)
  Top 0.254: v110.11,13.92 107.61,11.42 101.67,11.42 v101.09,12 | JP11.2 93.92,15.75 94.23,15.43 94.23,13.46 v95,12.7